# Altium PCB stimu.PcbDoc (part 1 of 2)
Units mm, origin at the board's own origin, x right, y up, seen from the top; angles counter-clockwise.
Board outline 36 x 36 mm, 6 copper layers (Top Layer, Signal Layer 1, Signal Layer 2, Signal Layer 3, Signal Layer 4, Bottom Layer), stack 1.231 mm thick; 97 components, 85 nets, 388 pads, 160 vias.
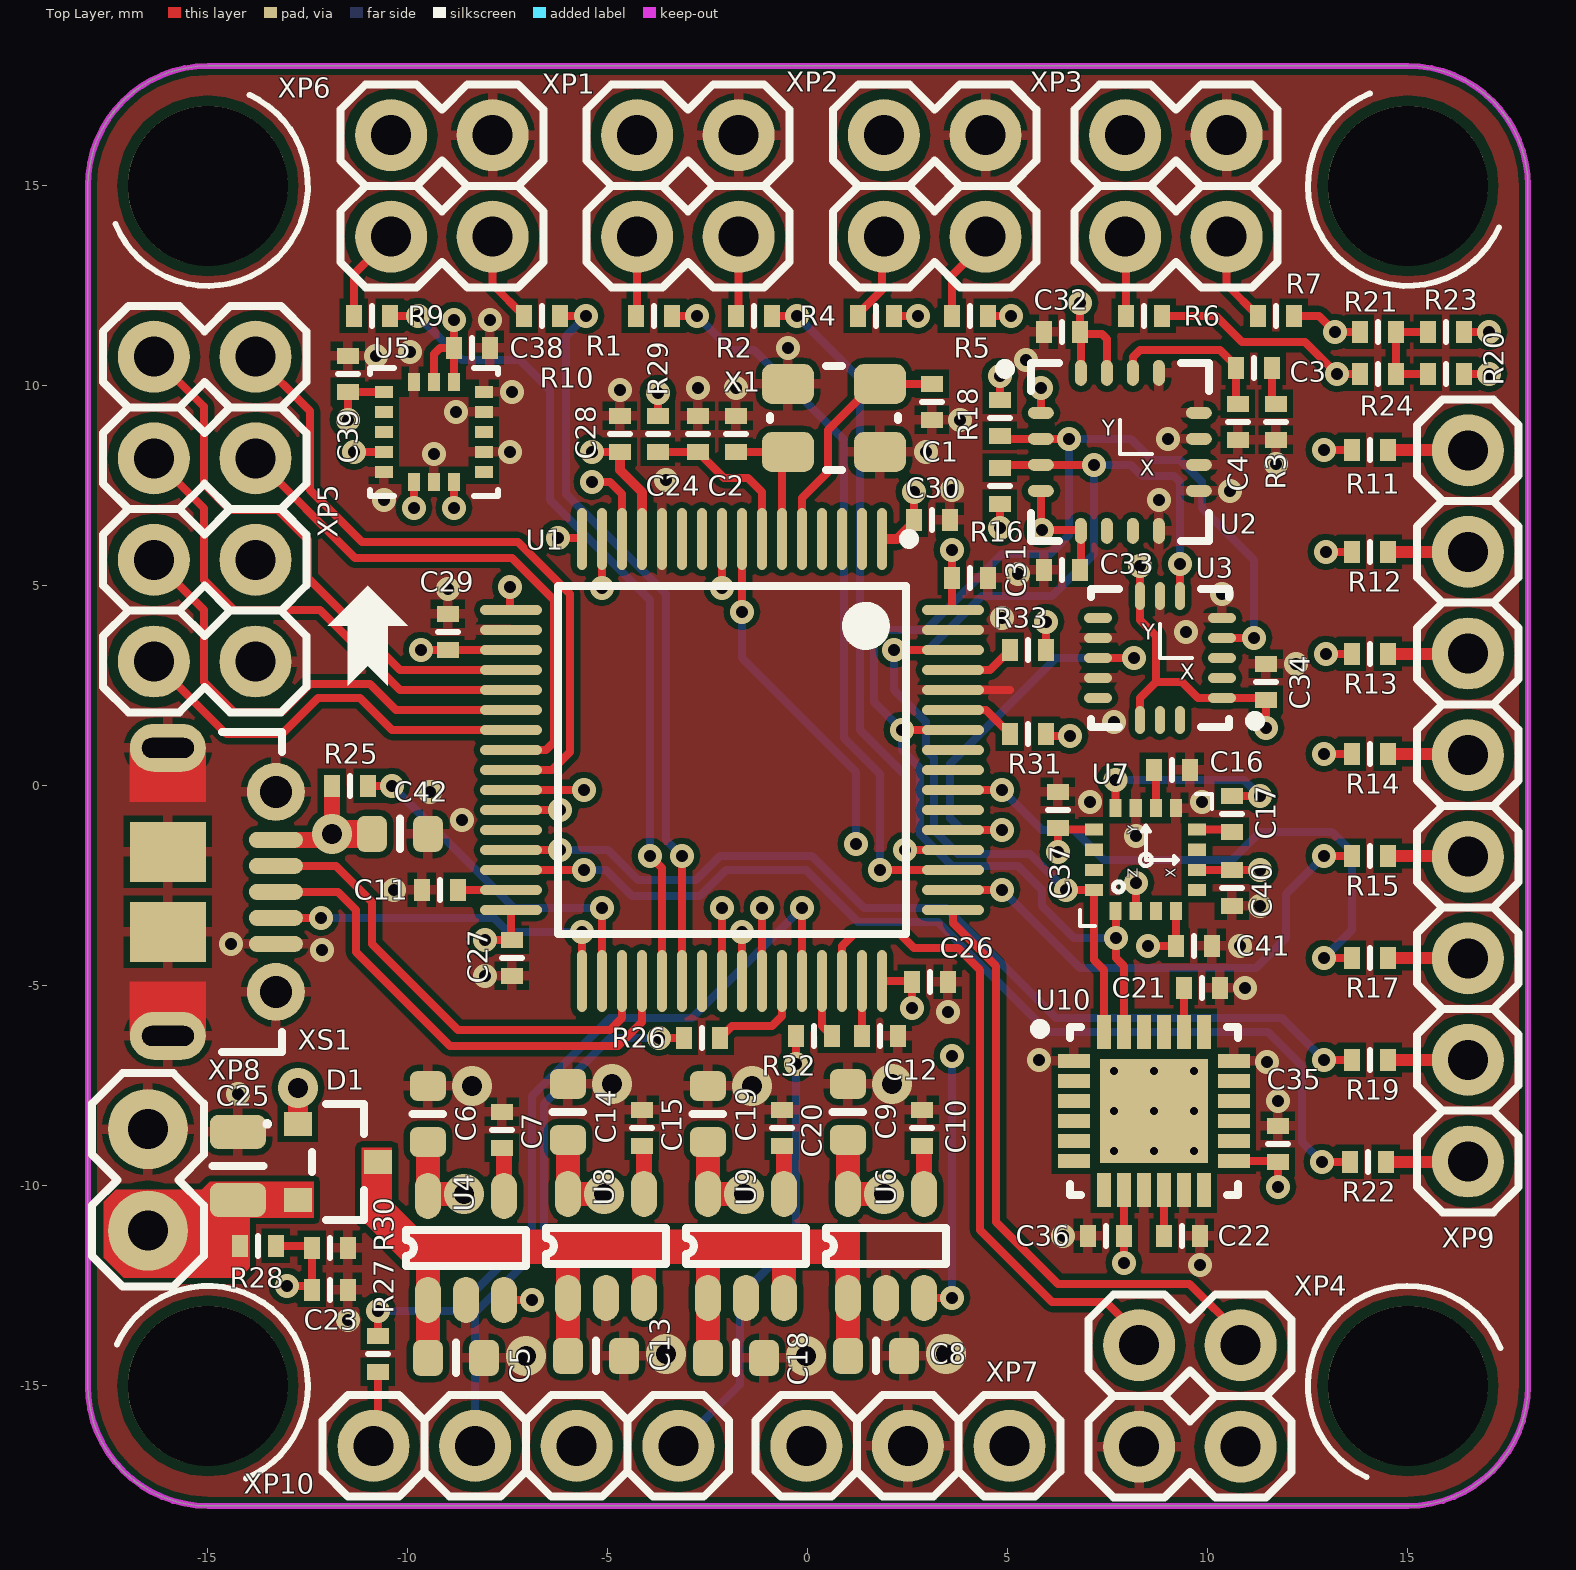
[diagram p0: Top Layer view]
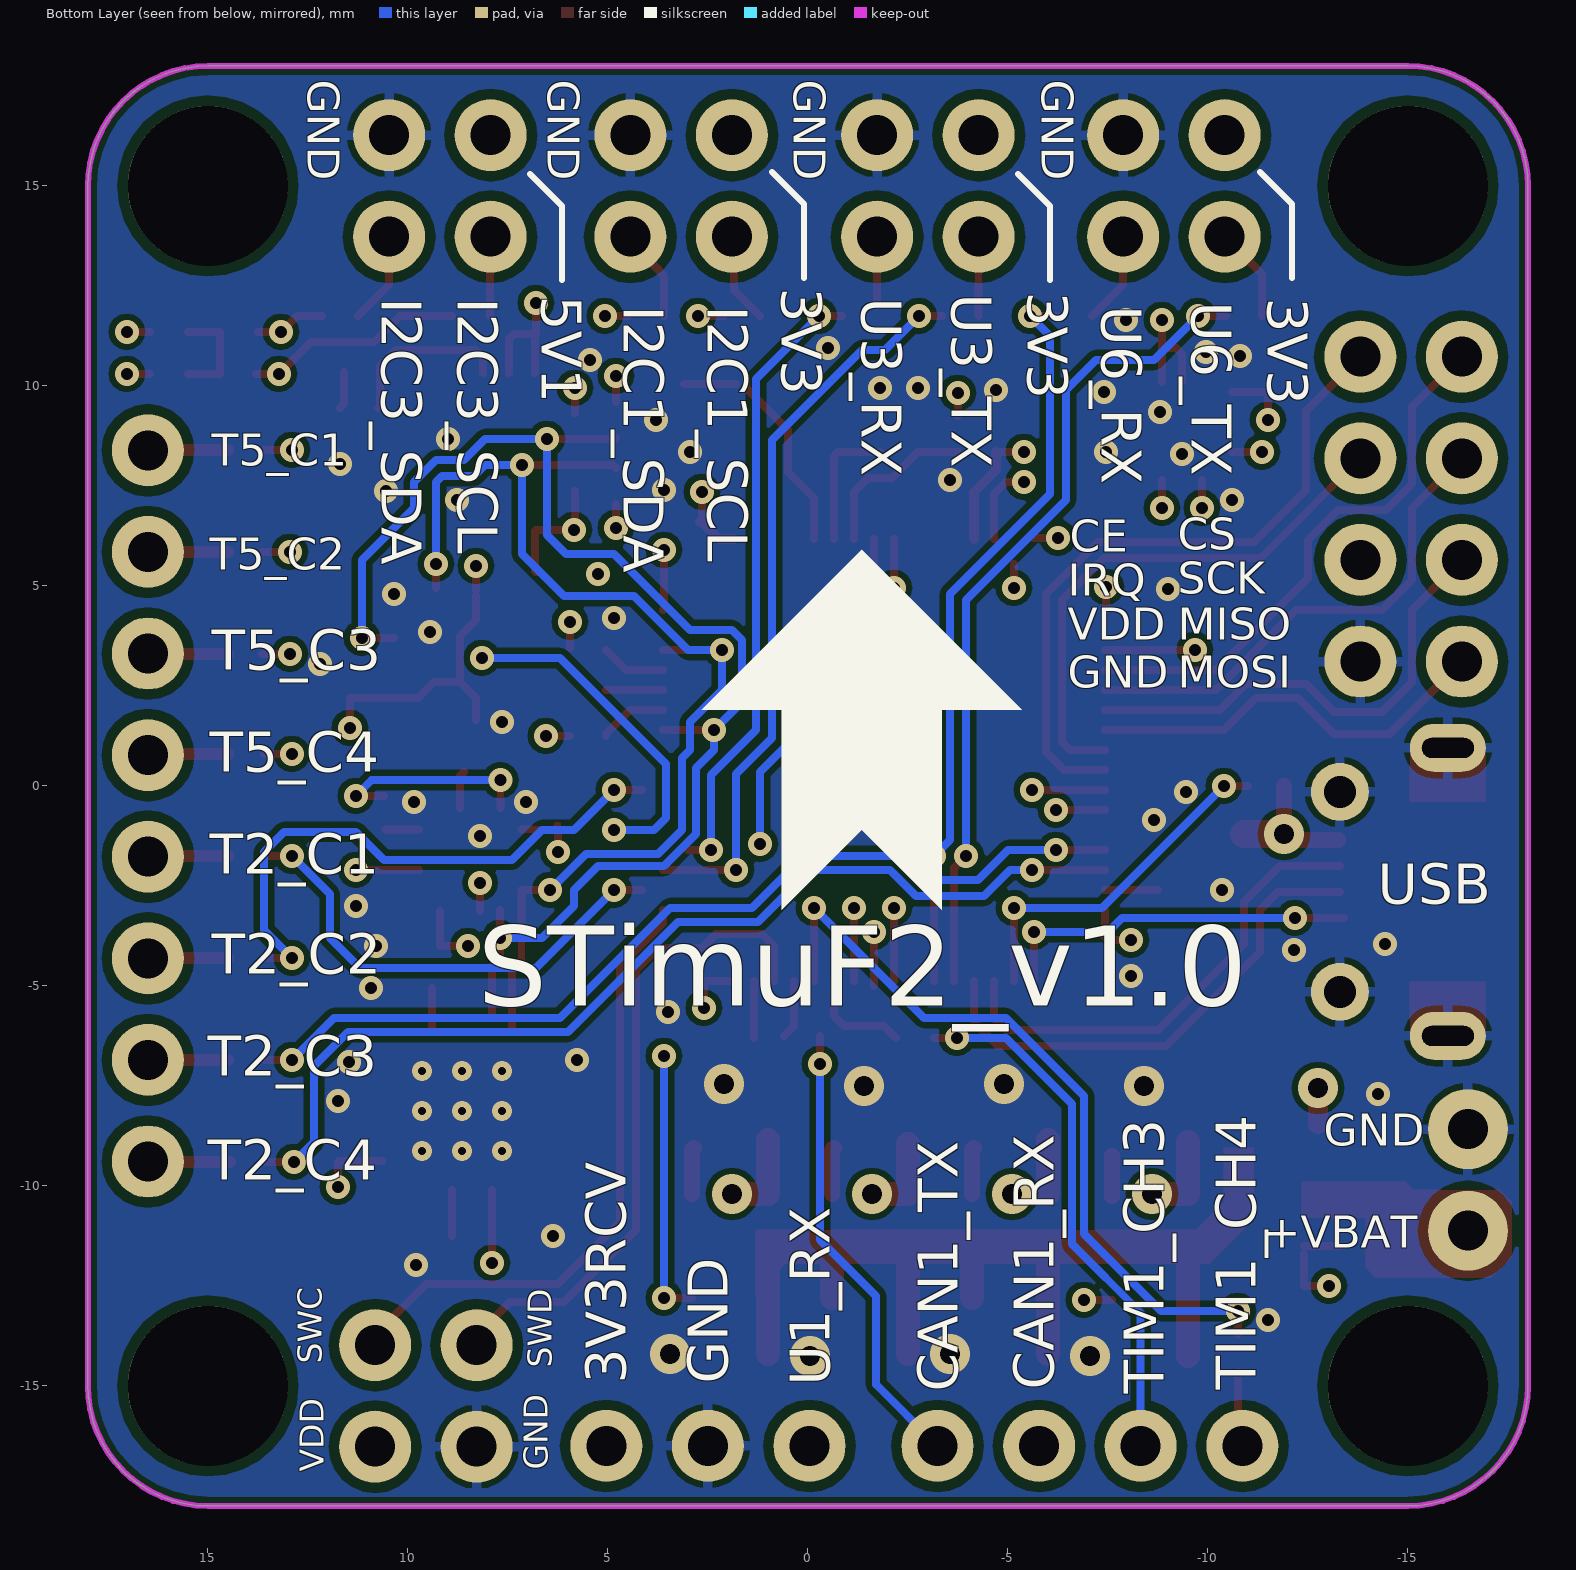
[diagram p1: Bottom Layer view, seen from below]
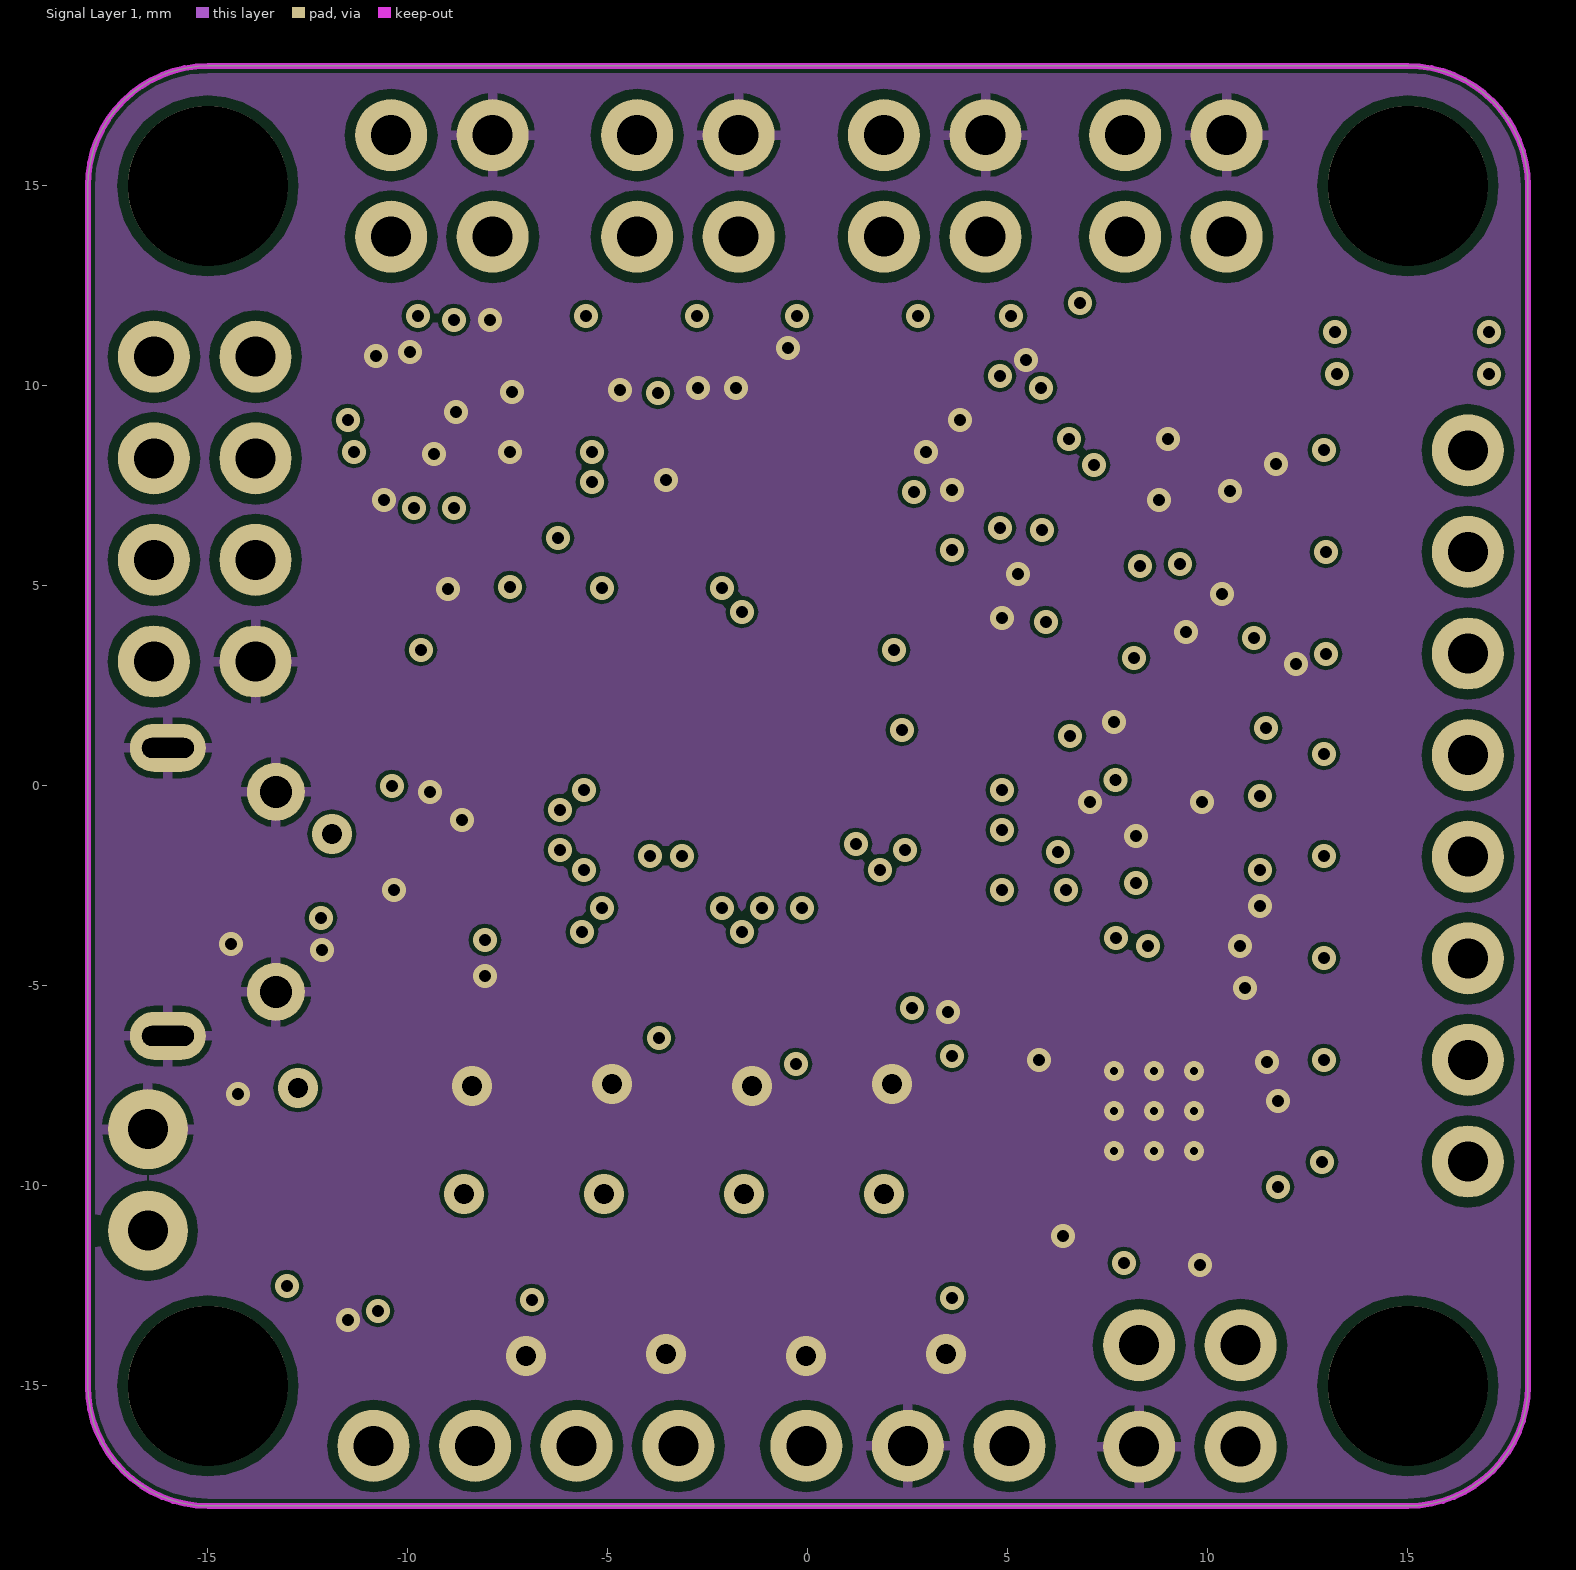
[diagram p2: Signal Layer 1]
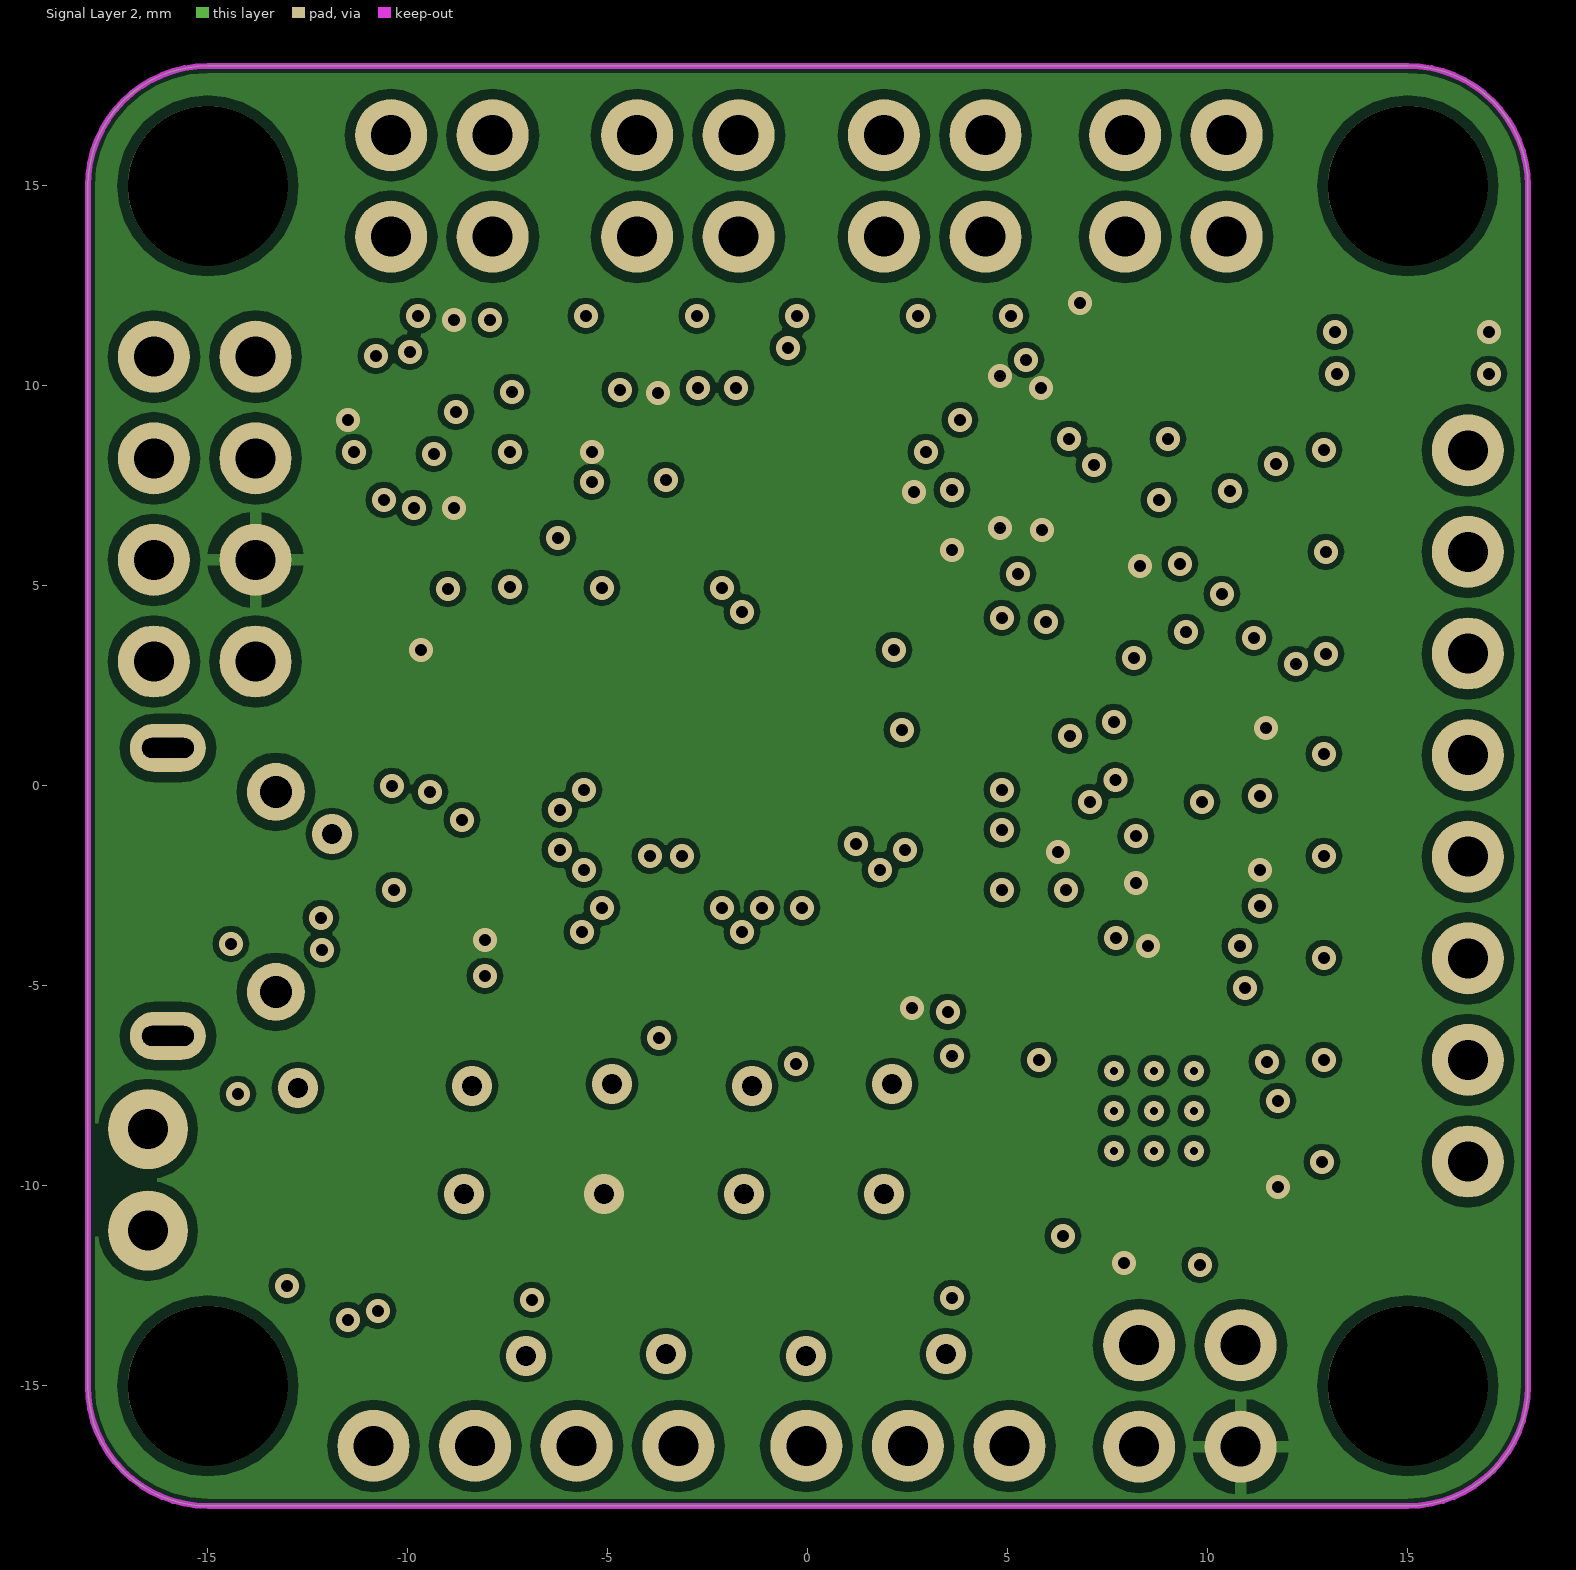
[diagram p3: Signal Layer 2]
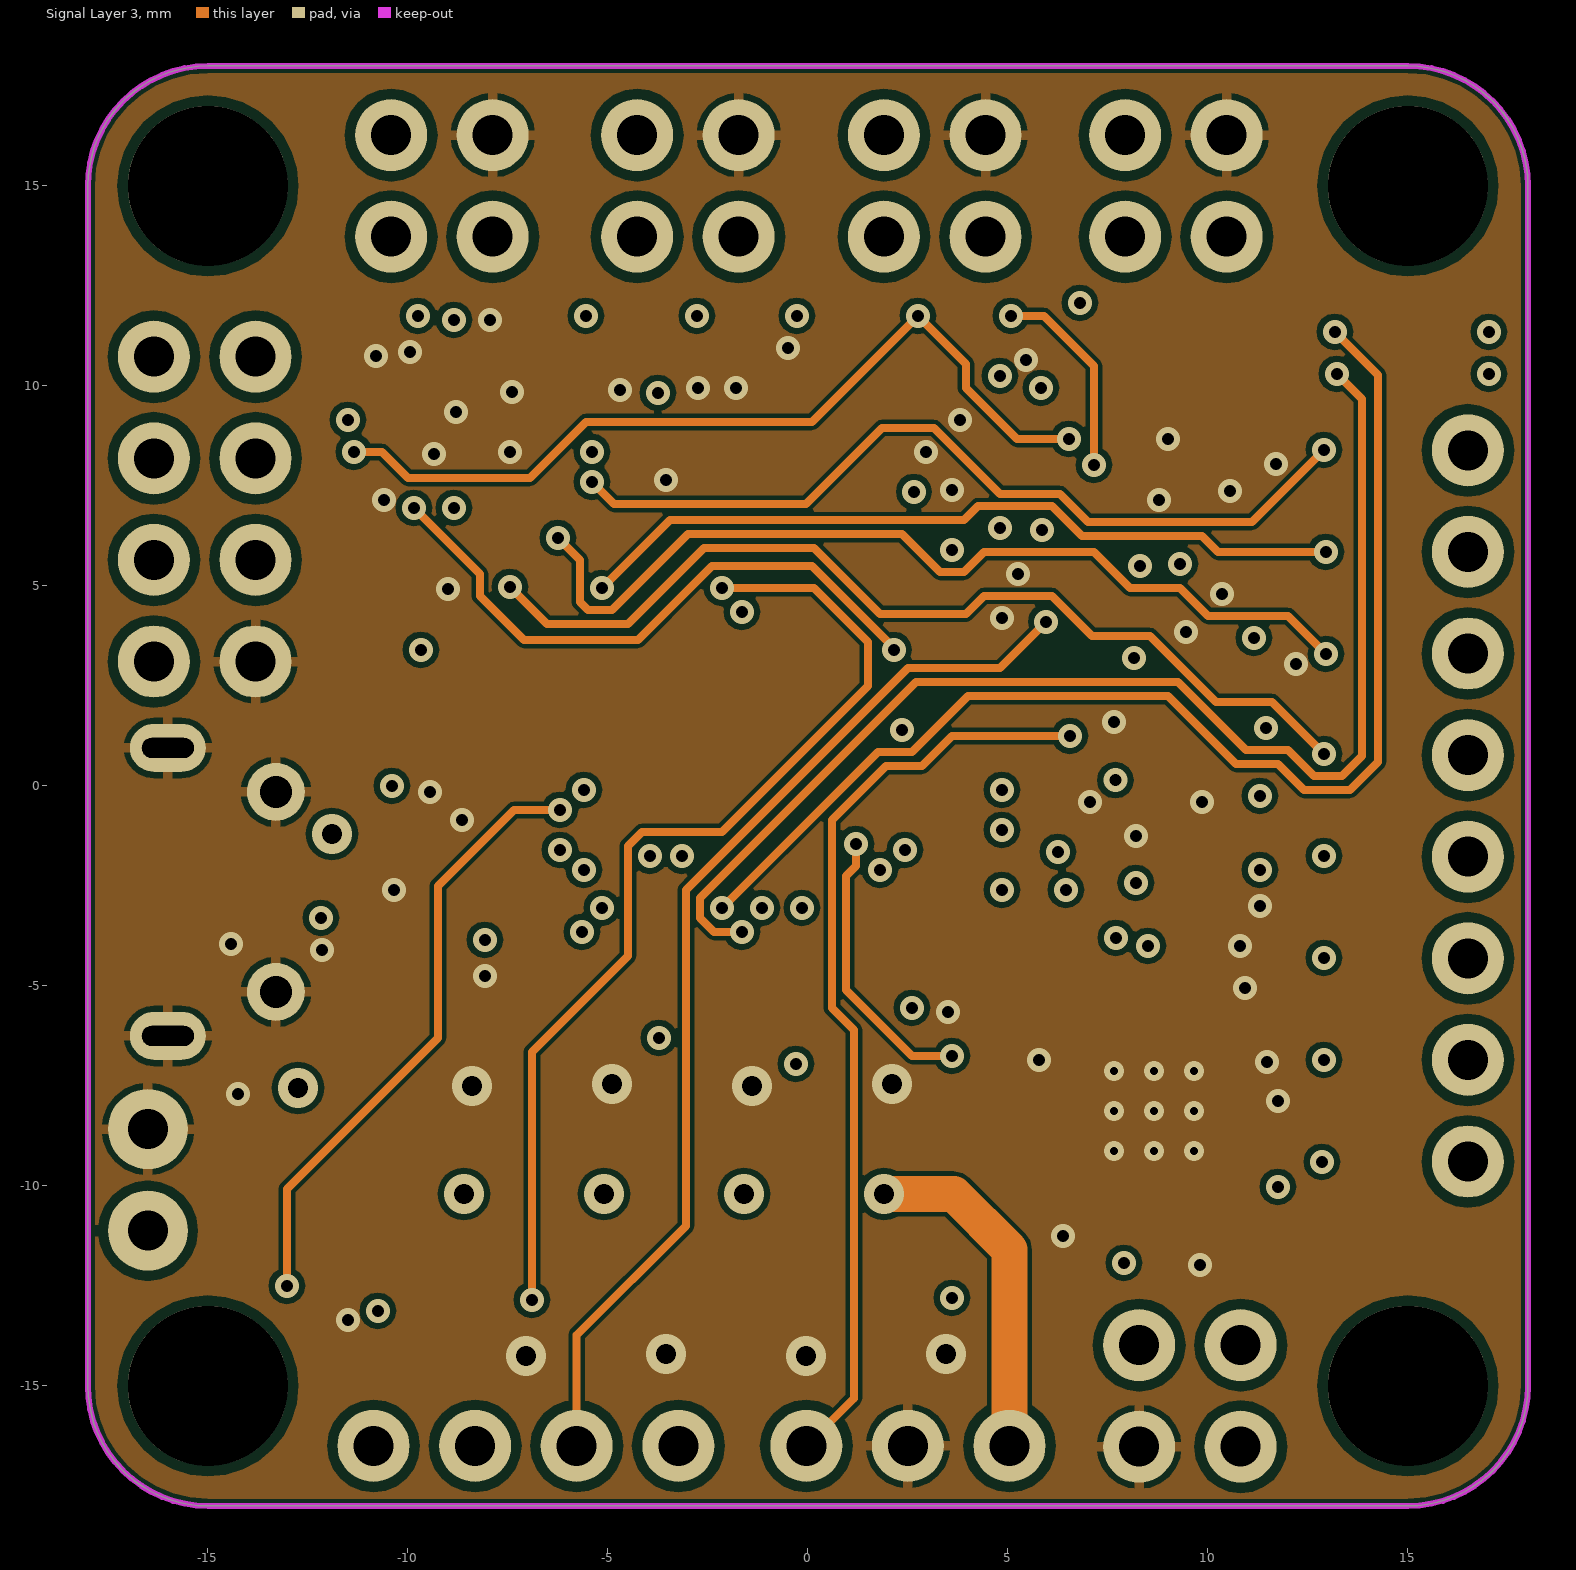
[diagram p4: Signal Layer 3]
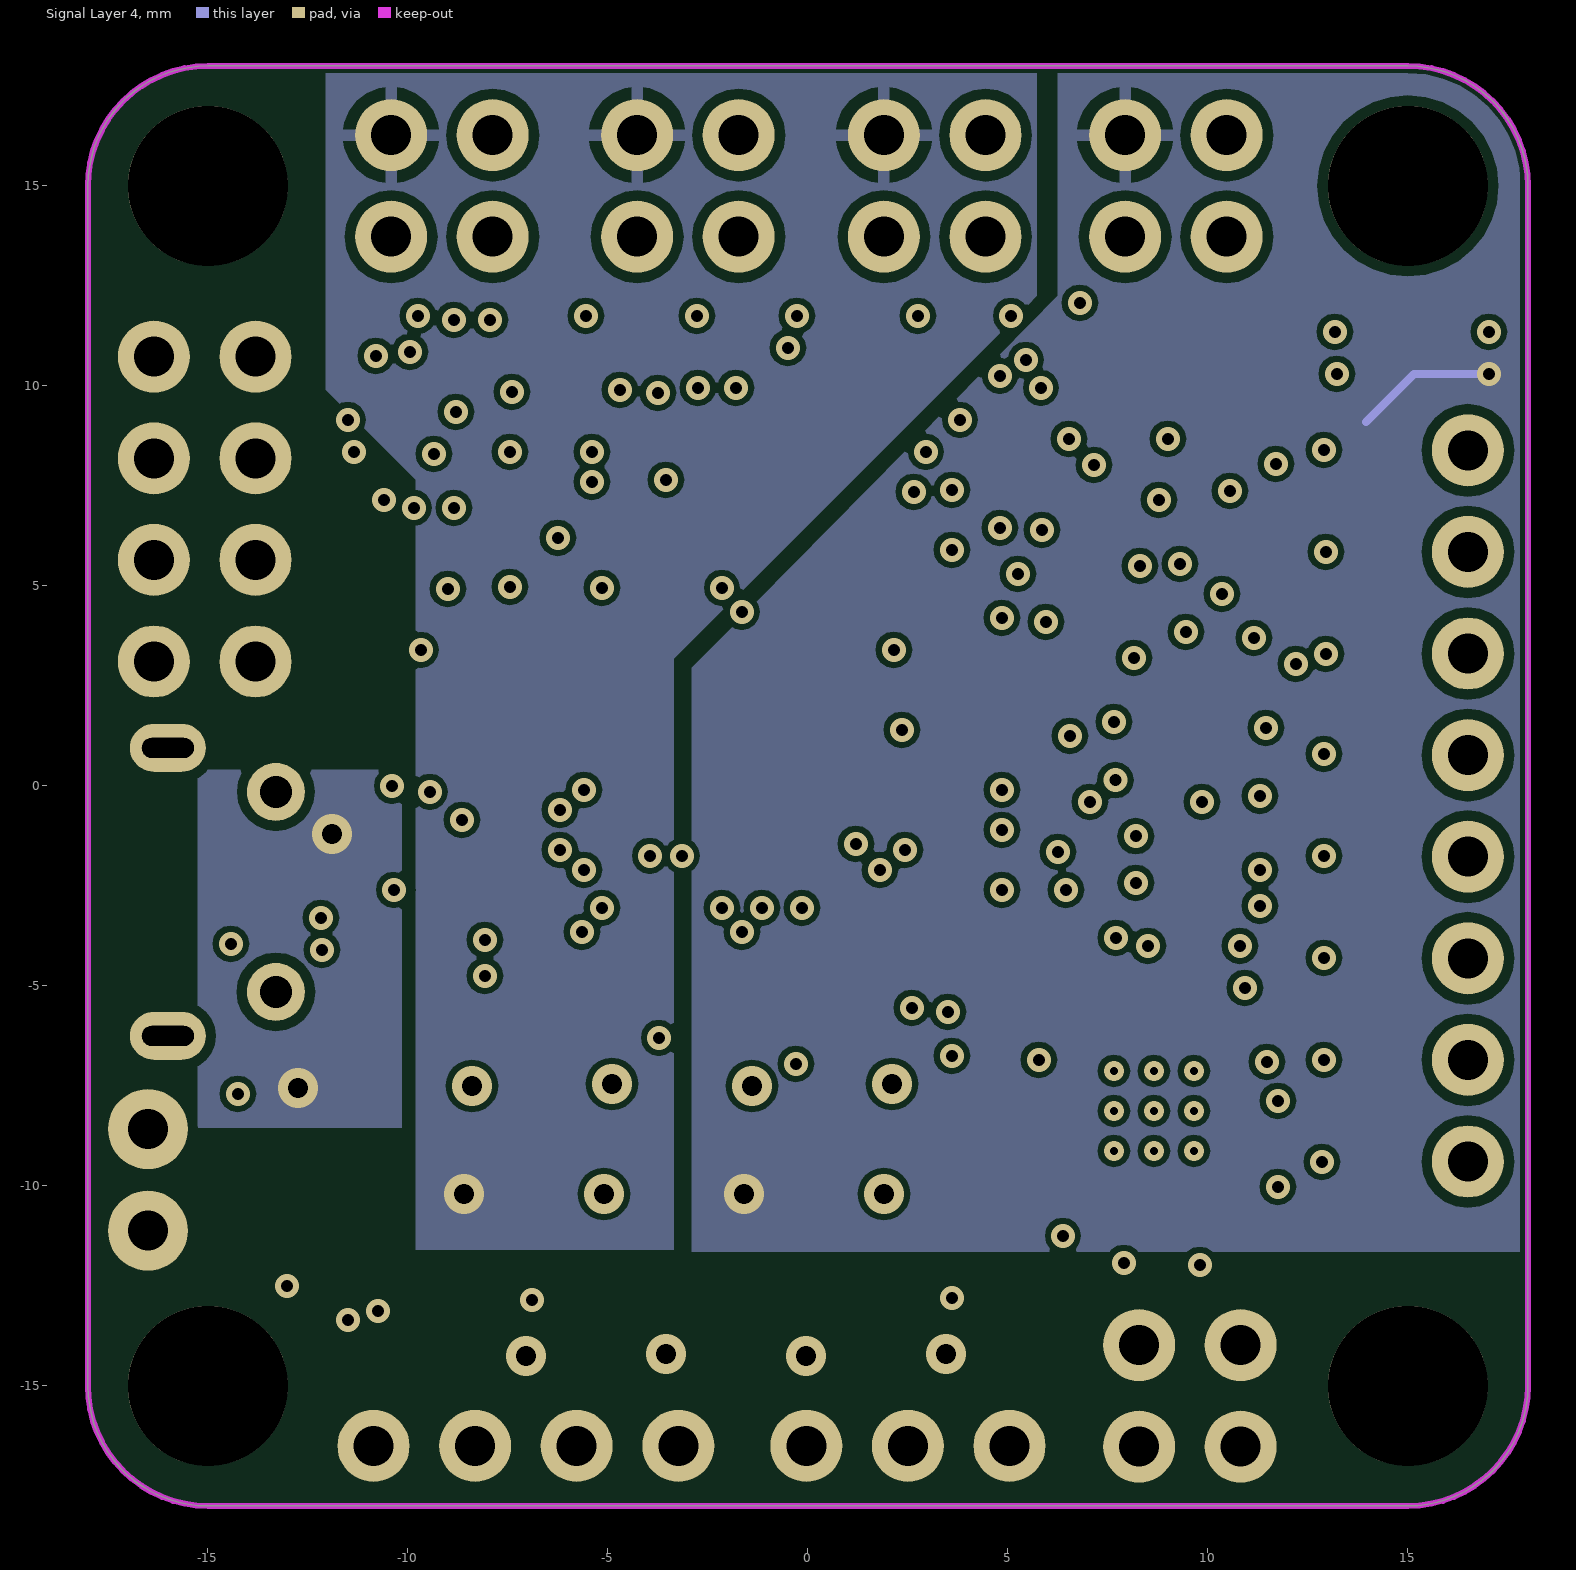
[diagram p5: Signal Layer 4]

## Layer stack, top to bottom
Top Solder: solder mask 0.0102, Solder Resist, Dk 3.5
Top Layer: signal copper 0.0356
Dielectric 1: core 0.254, FR-4, Dk 4.2
Signal Layer 1: signal copper 0.036
Dielectric 3: prepreg 0.127, Dk 4.2
Signal Layer 2: signal copper 0.036
Dielectric 2: core 0.254, Dk 4.2
Signal Layer 3: signal copper 0.036
Dielectric 5: prepreg 0.127, Dk 4.2
Signal Layer 4: signal copper 0.036
Dielectric 4: core 0.254, Dk 4.2
Bottom Layer: signal copper 0.0356
Bottom Solder: solder mask 0.0102, Solder Resist, Dk 3.5

## Board outline
-18,-15 -18,15 cw(c-15,15) -15,18 15,18 cw(c15,15) 18,15 18,-15 cw(c15,-15) 15,-18 -15,-18 cw(c-15,-15)

## Design rules (kind name [scope] priority, off if disabled: settings)
AssemblyTestPointUsage [All] p1 off:
AssemblyTestpoint [All] p1 off: testpointundercomponent=TRUE minsize=1.016 maxsize=2.54 preferedsize=1.524 minholesize=0 maxholesize=1.016 preferedholesize=0.813 testpointgrid=0.025 usegrid=TRUE gridtolerance=0 allowsidetop=TRUE allowsidebottom=TRUE
Clearance Clearance_Holes [IsPadHoleValid] p1: gap=0.25 ignorepadtopadclearanceinfootprint=FALSE except(0: Arc-Hole Track-Hole SMDPad-Hole THPad-Hole Via-Hole Fill-Hole Poly-Hole Region-Hole Text-Hole)
Clearance Clearance_Border [InPoly vs OnLayer('Keep-Out Layer, Board')] p2: gap=0.25 ignorepadtopadclearanceinfootprint=FALSE except(0: Arc-Hole Track-Hole SMDPad-Hole THPad-Hole Via-Hole Fill-Hole Poly-Hole Region-Hole Text-Hole)
Clearance Clearance_Poly_Top [InPoly and (OnLayer('Top Layer'))] p3: gap=0.15 ignorepadtopadclearanceinfootprint=FALSE except(0: Arc-Hole Track-Hole SMDPad-Hole THPad-Hole Via-Hole Fill-Hole Poly-Hole Region-Hole Text-Hole)
Clearance Clearance_Poly_Bottom [InPoly and (OnLayer('Bottom Layer'))] p4: gap=0.15 ignorepadtopadclearanceinfootprint=FALSE except(0: Arc-Hole Track-Hole SMDPad-Hole THPad-Hole Via-Hole Fill-Hole Poly-Hole Region-Hole Text-Hole)
Clearance Clearance_Via_Via [IsVia vs IsVia] p5: gap=0.15 ignorepadtopadclearanceinfootprint=FALSE except(0: Arc-Hole Track-Hole SMDPad-Hole THPad-Hole Via-Hole Fill-Hole Poly-Hole Region-Hole Text-Hole)
Clearance Clearance_Top [All vs OnLayer('Top Layer')] p6: gap=0.1 ignorepadtopadclearanceinfootprint=FALSE except(0: Arc-Hole Track-Hole SMDPad-Hole THPad-Hole Via-Hole Fill-Hole Poly-Hole Region-Hole Text-Hole)
Clearance Clearance_Bot [All vs OnLayer('Bottom Layer')] p7: gap=0.1 ignorepadtopadclearanceinfootprint=FALSE except(0: Arc-Hole Track-Hole SMDPad-Hole THPad-Hole Via-Hole Fill-Hole Poly-Hole Region-Hole Text-Hole)
Clearance Clearance_Via_Layer2 [IsVia vs OnLayer('Signal Layer 2')] p8: gap=0.15 ignorepadtopadclearanceinfootprint=FALSE except(0: Arc-Hole Track-Hole SMDPad-Hole THPad-Hole Via-Hole Fill-Hole Poly-Hole Region-Hole Text-Hole)
Clearance Clearance_Via_Layer3 [IsVia vs OnLayer('Signal Layer 3')] p9: gap=0.15 ignorepadtopadclearanceinfootprint=FALSE except(0: Arc-Hole Track-Hole SMDPad-Hole THPad-Hole Via-Hole Fill-Hole Poly-Hole Region-Hole Text-Hole)
Clearance Clearance_Via_Layer4 [IsVia vs OnLayer('Signal Layer 4')] p10: gap=0.15 ignorepadtopadclearanceinfootprint=FALSE except(0: Arc-Hole Track-Hole SMDPad-Hole THPad-Hole Via-Hole Fill-Hole Poly-Hole Region-Hole Text-Hole)
Clearance Clearance_Via_Layer5 [IsVia vs OnLayer('Signal Layer 5')] p11: gap=0.15 ignorepadtopadclearanceinfootprint=FALSE except(0: Arc-Hole Track-Hole SMDPad-Hole THPad-Hole Via-Hole Fill-Hole Poly-Hole Region-Hole Text-Hole)
Clearance Clearance_All [All] p12: gap=0.1 ignorepadtopadclearanceinfootprint=FALSE except(0: Arc-Hole Track-Hole SMDPad-Hole THPad-Hole Via-Hole Fill-Hole Poly-Hole Region-Hole Text-Hole)
ComponentClearance ComponentClearance_LCD1_DD1_DA6 [InComponent('LCD1') vs InComponent('DD1') or InComponent('DA6')] p1: gap=0 collisioncheckmode=3 verticalgap=0 showdistances=FALSE
ComponentClearance ComponentClearance_LCD1_XS1 [InComponent('LCD1') vs InComponent('XS1')] p2: gap=0 collisioncheckmode=3 verticalgap=0 showdistances=FALSE
ComponentClearance ComponentClearance_LCD1 [InComponent('LCD1')] p3: gap=0.2 collisioncheckmode=3 verticalgap=0 showdistances=FALSE
ComponentClearance [All] p4: gap=0.2 collisioncheckmode=3 verticalgap=0.2 showdistances=TRUE
FabricationTestPointUsage [All] p1 off: valid=0 allowmultiple=FALSE
FabricationTestpoint [All] p1 off: side=3 testpointundercomponent=TRUE minsize=1.016 maxsize=2.54 preferedsize=1.524 minholesize=0 maxholesize=1.016 preferedholesize=0.813 testpointgrid=0.025 allowsidetop=TRUE allowsidebottom=TRUE usegrid=TRUE gridtolerance=0
FanoutControl Fanout_BGA [IsBGA] p1 off: bgadir=Out bgaviamode=Centered fanoutstyle=Auto fanoutdirection=Alternating viagrid=0.025 // Fanout_BGA (Default Rule)
FanoutControl Fanout_LCC [IsLCC] p2 off: bgadir=Out bgaviamode=Centered fanoutstyle=Auto fanoutdirection=Alternating viagrid=0.025 // Fanout_LCC (Default Rule)
FanoutControl Fanout_SOIC [IsSOIC] p3 off: bgadir=Out bgaviamode=Centered fanoutstyle=Auto fanoutdirection=Alternating viagrid=0.025 // Fanout_SOIC (Default Rule)
FanoutControl Fanout_Small [(CompPinCount < 5)] p4 off: bgadir=Out bgaviamode=Centered fanoutstyle=Auto fanoutdirection=OutThenIn viagrid=0.025 // Fanout_Small (Default Rule)
FanoutControl Fanout_Default [All] p5 off: bgadir=Out bgaviamode=Centered fanoutstyle=Auto fanoutdirection=Alternating viagrid=0.025 // Fanout_Default (Default Rule)
HoleSize [All] p1: absolutevalues=TRUE maxlimit=5 minlimit=0.2 maxpercent=80.000 minpercent=20.000
MinimumSolderMaskSliver [All] p1 off: minsoldermaskwidth=0.1
NetAntennae [All] p1 off: netantennaetolerance=0
PlaneClearance [All] p1: clearance=0.3
PlaneConnect PlaneConnect_1 [InNet('GND')] p1: planeconnectstyle=Direct reliefexpansion=0.5 reliefentries=4 reliefconductorwidth=0.25 reliefairgap=0.25
PlaneConnect PlaneConnect_Thermopads [(InPadClass('DD4 ThermoPads'))] p2: planeconnectstyle=Direct reliefexpansion=0.508 reliefentries=4 reliefconductorwidth=0.254 reliefairgap=0.254
PlaneConnect PlaneConnect_Via [IsVia] p3: planeconnectstyle=Direct reliefexpansion=0.508 reliefentries=4 reliefconductorwidth=0.254 reliefairgap=0.254
PlaneConnect [All] p4: planeconnectstyle=Relief reliefexpansion=0.3 reliefentries=4 reliefconductorwidth=0.3 reliefairgap=0.3
PolygonConnect PolygonConnect_VIA [All vs IsVia] p1: connectstyle=Direct reliefconductorwidth=0.254 reliefentries=4 polygonreliefangle="90 Angle" airgapwidth=0.254
PolygonConnect PolygonConnect_3 [InNet('GND')] p2: connectstyle=Relief reliefconductorwidth=0.25 reliefentries=4 polygonreliefangle="90 Angle" airgapwidth=0.15
PolygonConnect PolygonConnect_4 [InNet('USB_VBUS')] p3: connectstyle=Direct reliefconductorwidth=0.254 reliefentries=4 polygonreliefangle="90 Angle" airgapwidth=0.254
PolygonConnect PolygonConnect_2 [InNet('9V_IN')] p4: connectstyle=Direct reliefconductorwidth=0.254 reliefentries=4 polygonreliefangle="90 Angle" airgapwidth=0.254
PolygonConnect PolygonConnect_1 [InNetClass('ExtraPowerLines')] p5: connectstyle=Direct reliefconductorwidth=0.254 reliefentries=4 polygonreliefangle="90 Angle" airgapwidth=0.254
PolygonConnect PolygonConnect_Thermopads [(InPadClass('DD4 ThermoPads'))] p6: connectstyle=Direct reliefconductorwidth=0.254 reliefentries=4 polygonreliefangle="90 Angle" airgapwidth=0.254
PolygonConnect PolygonConnect_DCPads [InPadClass('DCPads')] p7: connectstyle=Direct reliefconductorwidth=0.254 reliefentries=4 polygonreliefangle="90 Angle" airgapwidth=0.254
PolygonConnect PolygonConnect_DCParts [All vs InComponentClass('DCParts')] p8: connectstyle=Direct reliefconductorwidth=0.254 reliefentries=4 polygonreliefangle="90 Angle" airgapwidth=0.254
PolygonConnect [All] p9: connectstyle=Relief reliefconductorwidth=0.3 reliefentries=4 polygonreliefangle="90 Angle" airgapwidth=0.3
RoutingVias [All] p1: holewidth=0.2 width=0.4 viastyle="Through Hole" minholewidth=0.2 minwidth=0.4 maxholewidth=2 maxwidth=3
SilkToSilkClearance [All] p1 off: silktosilkclearance=0
SilkToSolderMaskClearance SilkscreenOverComponentPads [IsPad] p1: minsilkscreentomaskgap=0.1 clearancetoexposedcopper=TRUE
SolderMaskExpansion [All] p1: expansion=0.102
Width [All] p1: maxlimit=5 minlimit=0.1 preferedwidth=0.2
13 further rules are at their usual default settings.

## Components (designator, comment, footprint, x,y, rotation, side; value= is the part's Value field where it differs from the comment)
C1 "15pF" CAP0402R 3.1,9.6 r270 top
C2 "15pF" CAP0402R -1.8,8.8 r90 top
C3 "470nF" CAP0402R 11.15,10.45 r180 top
C4 "10nF" CAP0402R 10.75,9.1 r90 top
C5 "10uF" CAP0603R -8.8,-14.3 r180 top
C6 "10uF" CAP0603R -9.5,-8.2 r270 top
C7 "100nF" CAP0402R -7.65,-8.6 r90 top
C8 "10uF" CAP0603R 1.7,-14.25 r180 top
C9 "10uF" CAP0603R 1,-8.15 r270 top
C10 "100nF" CAP0402R 2.85,-8.55 r90 top
C11 "1uF" CAP0402R -9.2,-2.6 r0 top
C12 "1uF" CAP0402R 1.8,-6.25 r180 top
C13 "10uF" CAP0603R -5.3,-14.25 r180 top
C14 "10uF" CAP0603R -6,-8.15 r270 top
C15 "100nF" CAP0402R -4.15,-8.55 r90 top
C16 "4.7uF" CAP0402R 9.1,0.4 r0 top
C17 "220nF" CAP0402R 10.6,-0.7 r270 top
C18 "10uF" CAP0603R -1.8,-14.3 r180 top
C19 "10uF" CAP0603R -2.5,-8.2 r270 top
C20 "100nF" CAP0402R -0.65,-8.55 r90 top
C21 "1uF" CAP0402R 9.85,-5.05 r0 top
C22 "1uF" CAP0402R 9.35,-11.25 r0 top
C23 "1uF" CAP0402R -11.95,-12.6 r180 top
C24 "1uF" CAP0402R -2.75,8.8 r270 top
C25 "10uF" CAP0805R -14.25,-9.5 r270 top
C26 "1uF" CAP0402R 3.05,-4.9 r0 top
C27 "1uF" CAP0402R -7.4,-4.3 r270 top
C28 "1uF" CAP0402R -4.7,8.8 r90 top
C29 "1uF" CAP0402R -9,3.85 r90 top
C30 "1uF" CAP0402R 3.1,6.65 r0 top
C31 "1uF" CAP0402R 4.05,5.2 r0 top
C32 "1uF" CAP0402R 6.35,11.35 r180 top
C33 "1uF" CAP0402R 6.35,5.4 r180 top
C34 "1uF" CAP0402R 11.45,2.6 r90 top
C35 "1uF" CAP0402R 11.75,-8.95 r90 top
C36 "1uF" CAP0402R 7.45,-11.25 r180 top
C37 "1uF" CAP0402R 6.25,-0.6 r90 top
C38 "1uF" CAP0402R -8.4,10.95 r0 top
C39 "1uF" CAP0402R -11.5,10.3 r90 top
C40 "1uF" CAP0402R 10.6,-2.55 r270 top
C41 "1uF" CAP0402R 9.65,-4 r0 top
C42 "10uF" CAP0603R -10.2,-1.2 r180 top
D1 "BAT54C" NXP-SOT23-3_V -11.75,-9.4 r90 top
R1 "100" RES0402R -3.85,11.75 r180 top
R2 "100" RES0402R -1.35,11.75 r0 top
R3 "10k" RES0402R 11.7,9.1 r90 top
R4 "100" RES0402R 1.7,11.75 r180 top
R5 "100" RES0402R 4.05,11.75 r0 top
R6 "100" RES0402R 8.4,11.75 r180 top
R7 "100" RES0402R 11.7,11.75 r0 top
R9 "100" RES0402R -10.9,11.75 r180 top
R10 "100" RES0402R -6.65,11.75 r0 top
R11 "100" RES0402R 14.05,8.4 r0 top
R12 "100" RES0402R 14.05,5.85 r0 top
R13 "100" RES0402R 14.05,3.3 r0 top
R14 "100" RES0402R 14.05,0.8 r0 top
R15 "100" RES0402R 14.05,-1.75 r0 top
R16 "10k" RES0402R 4.8,7.5 r90 top
R17 "100" RES0402R 14.05,-4.3 r0 top
R18 "10k" RES0402R 4.8,9.2 r270 top
R19 "100" RES0402R 14.05,-6.85 r0 top
R20 "0" RES0402R 15.95,10.3 r180 top
R21 "10k" RES0402R 14.25,11.35 r180 top
R22 "100" RES0402R 14,-9.4 r0 top
R23 "0" RES0402R 15.95,11.35 r180 top
R24 "10k" RES0402R 14.25,10.3 r180 top
R25 "0" RES0402R -11.45,0 r180 top
R26 "100" RES0402R -2.65,-6.3 r180 top
R27 "100" RES0402R -10.75,-14.2 r270 top
R28 "10k" RES0402R -13.75,-11.5 r180 top
R29 "10k" RES0402R -3.75,8.8 r90 top
R30 "1k" RES0402R -11.95,-11.55 r180 top
R31 "100" RES0402R 5.5,1.3 r0 top
R32 "100" RES0402R 0.15,-6.25 r180 top
R33 "100" RES0402R 5.5,3.4 r0 top
U1 "STM32F205RET6" LQFP64_L -1.9,0.65 r270 top
U2 "L3G4200D" LGA16-4X4X1.1_L 7.8,8.35 r0 top
U3 "LIS3DH" STM-LGA-16_N 8.8,3.2 r180 top
U4 "LDS3985M28R" SOT23H15-5 -8.55,-11.55 r90 top
U5 "LPS331AP" HCLGA-16L -9.35,8.85 r0 top
U6 "LDS3985M28R" SOT23H15-5 1.95,-11.5 r90 top
U7 "HMC5983" HMC5983 8.45,-1.85 r90 top
U8 "LDS3985M28R" SOT23H15-5 -5.05,-11.5 r90 top
U9 "LDS3985M28R" SOT23H15-5 -1.55,-11.5 r90 top
U10 "MPU6050" INSE-QFN-24_V 8.65,-8.125 r0 top
X1 "24.0 MHz" 3225 0.65,9.2 r180 top value=24M
XP1 "PLD" PLD-04 -3,15 r270 top
XP2 "PLD" PLD-04 3.17,15 r270 top
XP3 "PLD" PLD-04 9.2,15 r270 top
XP4 "PLD" PLD-04 9.55,-15.25 r90 top
XP5 "PLD" PLD-08 -15.08,6.92 r270 top
XP6 "PLD" PLD-04 -9.15,15 r270 top
XP7 "PLS" PLS-03 2.5,-16.5 r180 top
XP8 "PLS" PLS-02 -16.5,-9.85 r90 top
XP9 "PLS" PLS-08 16.5,-0.5 r270 top
XP10 "PLS" PLS-04 -7.05,-16.5 r180 top
XS1 "105017-0001" 105017-0001 -18.15,-2.65 r270 top

## Footprints (in the part's own frame and the unit in brackets; to place one, negate y for a bottom-side part, rotate by r counter-clockwise, add the part's x,y. Pads: shape width x height; smd on the part's side, far side on the other; paste and mask are expansions set on the pad)
3225 [mm] "3.2x2.5x0.8mm Crystal"
  rrect50% 1.3x1 smd: 1(-1.15,-0.85) 2(1.15,-0.85) 3(1.15,0.85) 4(-1.15,0.85)
  silkscreen extent -1.6,-1.3 1.6,1.3, body extent -1.61,-1.25 1.61,1.25, height 0.82
105017-0001 [mm] "105017-0001 Micro USB Connector (Molex)"
  oval 0.4x1.35 smd: 1(-1.3,4.85) 2(-0.65,4.85) 3(0,4.85) 4(0.65,4.85) 5(1.3,4.85)
  oval 1.2x1.9 hole 0.5 slot 1.3 at 90 deg: SHLD(-3.6,2.15) SHLD(3.6,2.15)
  round 1.45 hole 0.8: SHLD(-2.5,4.85) SHLD(2.5,4.85)
  rect 1.5x1.9 smd: SHLD(-1,2.15) SHLD(1,2.15)
  Top Layer region: 2.25,3.1 3.6,3.1 3.6,1.2 2.25,1.2
  Top Layer region: -3.6,3.1 -2.25,3.1 -2.25,1.2 -3.6,1.2
  silkscreen extent -4,3.5 4,5, body extent -4.1,-0.4 4.1,5.03, height 2.72
CAP0402R [mm] "Capacitor 0402 reflow soldering"
  rect 0.4x0.55 smd: 1(-0.45,0) 2(0.45,0)
  silkscreen extent 0,-0.25 0,0.25, body extent -0.52,-0.27 0.53,0.28, height 0.56
CAP0603R [mm] "capacitor 0603 reflow soldering"
  rrect50% 0.745x0.9 smd: 1(-0.7,0) 2(0.7,0)
  silkscreen extent 0,-0.38 0,0.38, body extent -0.8,-0.4 0.8,0.4, height 0.81
CAP0805R [mm] "capacitor 0805 reflow soldering"
  rrect50% 0.85x1.4 smd: 1(-0.85,0) 2(0.85,0)
  silkscreen extent 0,-0.64 0,0.64, body extent -1,-0.62 1,0.63, height 0.61
HCLGA-16L [mm]
  rect 0.45x0.3 smd: 1(-1.25,1) 2(-1.25,0.5) 3(-1.25,0) 4(-1.25,-0.5) 5(-1.25,-1) 9(1.25,-1) 10(1.25,-0.5) 11(1.25,0) 12(1.25,0.5) 13(1.25,1)
  rect 0.3x0.45 smd: 6(-0.5,-1.25) 7(0,-1.25) 8(0.5,-1.25) 14(0.5,1.25) 15(0,1.25) 16(-0.5,1.25)
  silkscreen extent -1.6,-1.6 1.6,1.6, body extent -1.5,-1.5 1.5,1.5, height 1.01
HMC5983 [mil] "HMC5983"
  rect 18x12 smd: 1(-50.2,30) 2(-50.2,10) 3(-50.2,-9.84) 4(-50.2,-29.53) 9(51,-29.53) 10(51,-9.84) 11(51,10) 12(51,30)
  rect 12x18 smd: 5(-29.53,-50.2) 6(-9.84,-50.2) 7(10,-50.2) 8(30,-50.2) 13(30,51) 14(10,51) 15(-9.84,51) 16(-29.53,51)
  silkscreen extent -65,-65 65,65, body extent -59,-59 61,61, height 35
INSE-QFN-24_V [mm] "QFN, 24-Leads, Body 4.00x4.00mm, Pitch 0.50mm, Thermal Pad 2.7x2.6mm"
  rect 0.8x0.35 smd: 1(-2,1.25) 2(-2,0.75) 3(-2,0.25) 4(-2,-0.25) 5(-2,-0.75) 6(-2,-1.25) 13(2,-1.25) 14(2,-0.75) 15(2,-0.25) 16(2,0.25) 17(2,0.75) 18(2,1.25)
  rect 0.35x0.85 smd: 7(-1.25,-1.975) 8(-0.75,-1.975) 9(-0.25,-1.975) 10(0.25,-1.975) 11(0.75,-1.975) 12(1.25,-1.975) 19(1.25,1.975) 20(0.75,1.975) 21(0.25,1.975) 22(-0.25,1.975) 23(-0.75,1.975) 24(-1.25,1.975)
  rect 2.7x2.6 smd: 25(0,0)
  silkscreen extent -2.97,-2.1 2.1,2.17, body extent -2,-2 2,2, height 0.95
LGA16-4X4X1.1_L [mm] "PQFN, 16-Leads, Body 4x4mm, Pitch 0.65mm, IPC High Density"
  oval 0.65x0.3 smd: 1(-1.975,0.975) 2(-1.975,0.325) 3(-1.975,-0.325) 4(-1.975,-0.975) 9(1.975,-0.975) 10(1.975,-0.325) 11(1.975,0.325) 12(1.975,0.975)
  oval 0.3x0.65 smd: 5(-0.975,-1.975) 6(-0.325,-1.975) 7(0.325,-1.975) 8(0.975,-1.975) 13(0.975,1.975) 14(0.325,1.975) 15(-0.325,1.975) 16(-0.975,1.975)
  silkscreen extent -3,-2.22 2.22,2.22, body extent -2.07,-2.07 2.07,2.07, height 1.1
LQFP64_L [mm] "Thin QFP, 64-Leads, Body 10x10mm, Pitch 0.5mm, IPC High Density"
  oval 1.55x0.25 smd: 1(-5.525,3.75) 2(-5.525,3.25) 3(-5.525,2.75) 4(-5.525,2.25) 5(-5.525,1.75) 6(-5.525,1.25) 7(-5.525,0.75) 8(-5.525,0.25) 9(-5.525,-0.25) 10(-5.525,-0.75) 11(-5.525,-1.25) 12(-5.525,-1.75) 13(-5.525,-2.25) 14(-5.525,-2.75) 15(-5.525,-3.25) 16(-5.525,-3.75) 33(5.525,-3.75) 34(5.525,-3.25) 35(5.525,-2.75) 36(5.525,-2.25) 37(5.525,-1.75) 38(5.525,-1.25) 39(5.525,-0.75) 40(5.525,-0.25) 41(5.525,0.25) 42(5.525,0.75) 43(5.525,1.25) 44(5.525,1.75) 45(5.525,2.25) 46(5.525,2.75) 47(5.525,3.25) 48(5.525,3.75)
  oval 0.25x1.55 smd: 17(-3.75,-5.525) 18(-3.25,-5.525) 19(-2.75,-5.525) 20(-2.25,-5.525) 21(-1.75,-5.525) 22(-1.25,-5.525) 23(-0.75,-5.525) 24(-0.25,-5.525) 25(0.25,-5.525) 26(0.75,-5.525) 27(1.25,-5.525) 28(1.75,-5.525) 29(2.25,-5.525) 30(2.75,-5.525) 31(3.25,-5.525) 32(3.75,-5.525) 49(3.75,5.525) 50(3.25,5.525) 51(2.75,5.525) 52(2.25,5.525) 53(1.75,5.525) 54(1.25,5.525) 55(0.75,5.525) 56(0.25,5.525) 57(-0.25,5.525) 58(-0.75,5.525) 59(-1.25,5.525) 60(-1.75,5.525) 61(-2.25,5.525) 62(-2.75,5.525) 63(-3.25,5.525) 64(-3.75,5.525)
  silkscreen extent -5.65,-4.35 4.35,4.55, body extent -5,-5 5,5, height 1.6
NXP-SOT23-3_V [mm] "SOT23, 3-Leads, Body 1.3x2.9mm, Pitch 0.95mm"
  rect 0.6x0.7 smd paste-0.05: 1(0.95,1) 2(-0.95,1) 3(0,-1)
  silkscreen extent -1.45,-0.65 1.45,1.79, body extent -1.45,-0.65 1.45,0.65, height 1.1
PLD-04 [mm]
  round 1.8 hole 1: 1(-1.27,-1.27) 2(-1.27,1.27) 3(1.27,-1.27) 4(1.27,1.27)
  silkscreen extent -2.54,-2.54 2.54,2.54, body extent -2.54,-2.54 2.54,2.54, height 8.45
PLD-08 [mm]
  round 1.8 hole 1: 1(-3.81,-1.27) 2(-3.81,1.27) 3(-1.27,-1.27) 4(-1.27,1.27) 5(1.27,-1.27) 6(1.27,1.27) 7(3.81,-1.27) 8(3.81,1.27)
  silkscreen extent -5.08,-2.54 5.08,2.54, body extent -5.08,-2.54 5.08,2.54, height 8.45
PLS-02 [mm]
  round 2 hole 1: 1(-1.27,0) 2(1.27,0)
  silkscreen extent -2.67,-1.4 2.67,1.4, body extent -2.54,-1.27 2.54,1.27, height 8.45
PLS-03 [mm]
  round 1.8 hole 1: 1(-2.54,0) 2(0,0) 3(2.54,0)
  silkscreen extent -3.81,-1.27 3.81,1.27, body extent -3.81,-1.27 3.81,1.27, height 8.45
PLS-04 [mm]
  round 1.8 hole 1: 1(-3.81,0) 2(-1.27,0) 3(1.27,0) 4(3.81,0)
  silkscreen extent -5.08,-1.27 5.08,1.27, body extent -5.08,-1.27 5.08,1.27, height 8.45
PLS-08 [mm]
  round 1.8 hole 1: 1(-8.89,0) 2(-6.35,0) 3(-3.81,0) 4(-1.27,0) 5(1.27,0) 6(3.81,0) 7(6.35,0) 8(8.89,0)
  silkscreen extent -10.16,-1.27 10.16,1.27, body extent -10.16,-1.27 10.16,1.27, height 8.45
RES0402R [mm] "resistor 0402 reflow soldering"
  rect 0.4x0.55 smd: 1(-0.45,0) 2(0.45,0)
  silkscreen extent 0,-0.25 0,0.25, body extent -0.5,-0.25 0.5,0.25, height 0.36
SOT23H15-5 [mm] "SOT23, 5-Leads, Body 2.9x1.6mm, Pitch 0.95mm, Lead Span 2.8mm, IPC High Density"
  oval 1.15x0.65 smd mask+0.1: 1(-1.3,0.95) 2(-1.3,0) 3(-1.3,-0.95) 4(1.3,-0.95) 5(1.3,0.95)
  silkscreen extent -0.45,-1.5 0.45,1.5, body extent -1.5,-1.5 1.5,1.5, height 1.3
STM-LGA-16_N [mm] "LGA, 16-Leads, Body 3.15x3.15mm, Pitch 0.5mm, IPC Medium Density"
  oval 0.7x0.25 smd: 1(-1.55,1) 2(-1.55,0.5) 3(-1.55,0) 4(-1.55,-0.5) 5(-1.55,-1) 9(1.55,-1) 10(1.55,-0.5) 11(1.55,0) 12(1.55,0.5) 13(1.55,1)
  oval 0.25x0.7 smd: 6(-0.5,-1.55) 7(0,-1.55) 8(0.5,-1.55) 14(0.5,1.55) 15(0,1.55) 16(-0.5,1.55)
  silkscreen extent -2.5,-1.73 1.73,1.73, body extent -1.58,-1.58 1.58,1.58, height 1

## Part data
C1 C2: library part CC0402_15PF_50V_5%_NP0, Case=0402, Manufacturer=GENERIC, Manufacturer1 ComponentHeight=0.55mm, Manufacturer1 Example=PHYCOMP, Manufacturer1 Part Number=223886915159, Manufacturer Part Number 2=CC0402JPNPO9BN150, Tolerance=±5%, Voltage=50V, Author="I. Kuznetsov", Component Type=Standard, CreateDate=03.12.2007, HelpURL=\\cern.ch\dfs\Applications\Altium\Datasheets\CC0402_NP0_PHYCOMP.pdf, LatestRevisionDate=03.12.2007, Manufacturer Part Number=CC0402_15PF_50V_5%_NP0, Mounted=Yes, Part Description="SMD Multilayer Chip Ceramic Capacitor", Part Number=CC0402_15PF_50V_5%_NP0, Pin Count=2, SMD=Yes, Socket=No, Status="Not Recommended", Table="Capacitors SMD", TC=NP0
C3: library part CC0402_470NF_6.3V_10%_X5R, Case=0402, Manufacturer=GENERIC, Manufacturer1 ComponentHeight=0.55mm, Manufacturer1 Example=MURATA, Manufacturer1 Part Number=GRM155R60J474KE19D, Tolerance=±10%, Voltage=6.3V, Author="I. Kuznetsov", Component Type=Standard, CreateDate=22.04.2010, HelpURL=\\cern.ch\dfs\Applications\Altium\Datasheets\CC0402_X5R_MURATA_GRM.pdf, LatestRevisionDate=22.04.2010, Manufacturer Part Number=CC0402_470NF_6.3V_10%_X5R, Mounted=Yes, Part Description="SMD Multilayer Chip Ceramic Capacitor", Part Number=CC0402_470NF_6.3V_10%_X5R, Pin Count=2, SMD=Yes, Socket=No, Status=Preferred, Table="Capacitors SMD", TC=X5R
C4: library part CC0402_10NF_25V_10%_X7R, Case=0402, Manufacturer=GENERIC, Manufacturer1 ComponentHeight=0.55mm, Manufacturer1 Example=TDK, Manufacturer1 Part Number=C1005X7R1E103KT, Tolerance=±10%, Voltage=25V, Author="I. Kuznetsov", Component Type=Standard, CreateDate=25.10.2012, HelpURL=\\cern.ch\dfs\Applications\Altium\Datasheets\CC0402_X7R_TDK_C.pdf, LatestRevisionDate=25.10.2012, Manufacturer Part Number=CC0402_10NF_25V_10%_X7R, Mounted=Yes, Part Description="SMD Multilayer Chip Ceramic Capacitor", Part Number=CC0402_10NF_25V_10%_X7R, Pin Count=2, SMD=Yes, Socket=No, Status=Preferred, Table="Capacitors SMD", TC=X7R
C5 C6 C8 C9 C13 C14 C18 C19 C42: library part CC0603_10UF_6.3V_20%_X5R, Case=0603, Manufacturer=GENERIC, Manufacturer1 ComponentHeight=0.95mm, Manufacturer1 Example=KEMET, Manufacturer1 Part Number=C0603C106M9PAC, Manufacturer Part Number=CC0603_10uF_6.3V_20%_X5R, Tolerance=±20%, Voltage=6.3V, Author="I. Kuznetsov", Component Type=Standard, CreateDate=03.12.2007, HelpURL=\\cern.ch\dfs\Applications\Altium\Datasheets\CC0603_X5R_KEMET.pdf, LatestRevisionDate=03.12.2007, Mounted=Yes, Part Description="SMD Multilayer Chip Ceramic Capacitor", Part Number=CC0603_10UF_6.3V_20%_X5R, Pin Count=2, SMD=Yes, Socket=No, Status=Preferred, Table="Capacitors SMD", TC=X5R
C7 C10 C15 C20: library part CC0402_100NF_16V_10%_X5R, Case=0402, Manufacturer=GENERIC, Manufacturer1 ComponentHeight=0.55mm, Manufacturer1 Example=MURATA, Manufacturer1 Part Number=GRM155R61C104KA88D, Manufacturer Part Number 2=CC0402KPX5R7BB104, Tolerance=±10%, Voltage=16V, Author="I. Kuznetsov", Component Type=Standard, CreateDate=10.12.2013, HelpURL=\\cern.ch\dfs\Applications\Altium\Datasheets\CC0402_X5R_MURATA_GRM.pdf, LatestRevisionDate=10.12.2013, Manufacturer Part Number=CC0402_100NF_16V_10%_X5R, Mounted=Yes, Part Description="SMD Multilayer Chip Ceramic Capacitor", Part Number=CC0402_100NF_16V_10%_X5R, Pin Count=2, SMD=Yes, Socket=No, Status=None, Table="Capacitors SMD", TC=X5R
C11 C12 C21 C22 C23 C24 C26 C27 C28 C29 C30 C31 C32 C33 C34 C35 C36 C37 C38 C39 C40 C41: library part CC0402_1UF_16V_10%_X5R, Case=0402, Manufacturer=GENERIC, Manufacturer1 ComponentHeight=0.55mm, Manufacturer1 Example=TDK, Manufacturer1 Part Number=C1005X5R1C105KT, Tolerance=±10%, Voltage=16V, Author="I. Kuznetsov", Component Type=Standard, CreateDate=25.10.2012, HelpURL=\\cern.ch\dfs\Applications\Altium\Datasheets\CC0402_X5R_TDK_C.pdf, LatestRevisionDate=25.10.2012, Manufacturer Part Number=CC0402_1UF_16V_10%_X5R, Mounted=Yes, Part Description="SMD Multilayer Chip Ceramic Capacitor", Part Number=CC0402_1UF_16V_10%_X5R, Pin Count=2, SMD=Yes, Socket=No, Status=Preferred, Table="Capacitors SMD", TC=X5R
C16: library part CC0402_4.7UF_4V_20%_X5R, Case=0402, Manufacturer=GENERIC, Manufacturer1 ComponentHeight=0.55mm, Manufacturer1 Example=KEMET, Manufacturer1 Part Number=C0402C475M7PAC, Manufacturer Part Number 2=CC0402MRX5R4BB475, Tolerance=±20%, Voltage=4V, Author="I. Kuznetsov", Component Type=Standard, CreateDate=08.06.2010, HelpURL=\\cern.ch\dfs\Applications\Altium\Datasheets\CC0402_X5R_KEMET.pdf, LatestRevisionDate=08.06.2010, Manufacturer Part Number=CC0402_4.7UF_4V_20%_X5R, Mounted=Yes, Part Description="SMD Multilayer Chip Ceramic Capacitor", Part Number=CC0402_4.7UF_4V_20%_X5R, Pin Count=2, SMD=Yes, Socket=No, Status=Preferred, Table="Capacitors SMD", TC=X5R
C17: library part CC0402_220NF_16V_10%_X7R, Case=0402, Manufacturer=GENERIC, Manufacturer1 ComponentHeight=0.55mm, Manufacturer1 Example=TDK, Manufacturer1 Part Number=C1005X7R1C224KT, Manufacturer Part Number 2=CC0402KRX7R7BB224, Tolerance=±10%, Voltage=16V, Author="I. Kuznetsov", Component Type=Standard, CreateDate=25.10.2012, HelpURL=\\cern.ch\dfs\Applications\Altium\Datasheets\CC0402_X7R_TDK_C.pdf, LatestRevisionDate=25.10.2012, Manufacturer Part Number=CC0402_220NF_16V_10%_X7R, Mounted=Yes, Part Description="SMD Multilayer Chip Ceramic Capacitor", Part Number=CC0402_220NF_16V_10%_X7R, Pin Count=2, SMD=Yes, Socket=No, Status=Preferred, Table="Capacitors SMD", TC=X7R
C25: library part CC0805_10UF_10V_10%_X7R, Case=0805, Manufacturer=GENERIC, Manufacturer1 ComponentHeight=1.35mm, Manufacturer1 Example=MURATA, Manufacturer1 Part Number=GRM21BR71A106KE51L, Manufacturer Part Number 2=CC0805KKX7R6BB106, Tolerance=±10%, Voltage=10V, Author="I. Kuznetsov", Component Type=Standard, CreateDate=30.04.2012, HelpURL=\\cern.ch\dfs\Applications\Altium\Datasheets\CC0805_X7R_MURATA.pdf, LatestRevisionDate=30.04.2012, Manufacturer Part Number=CC0805_10UF_10V_10%_X7R, Mounted=Yes, Part Description="SMD Multilayer Chip Ceramic Capacitor", Part Number=CC0805_10UF_10V_10%_X7R, Pin Count=2, SMD=Yes, Socket=No, Status=Preferred, Table="Capacitors SMD", TC=X7R
D1: library part CMP-0417-00003-1, "Schottky Barrier Diode, 30 V, 2 uA, -55 to 150 degC, 3-Pin SOT23, RoHS, Tape and Reel", Manufacturer="NXP Semiconductors", Temperature Range="-55 to 150 degC", Cd (pF)=10, ComponentLink1Description="Manufacturer URL", ComponentLink1URL=http://www.nxp.com/, ComponentLink2Description=Datasheet, ComponentLink2URL=http://www.nxp.com/documents/data_sheet/BAT54_SER.pdf, DatasheetVersion="Rev. 5", IR (uA)=2, Mounting Technology="Surface Mount", PackageDescription="3-Pin Plastic Surface-mounted Package, Body 1.3 x 2.9 mm, Pitch 0.95 mm", PackageReference=SOT23-3, Packing="Tape and Reel", PartNumber=BAT54C, RoHS=TRUE, Rth(j-a) (K/W)=500, Trr (ns)=5, VF (mV)=800, VR (V)=30
R1 R2 R4 R5 R6 R7 R9 R10 R11 R12 R13 R14 R15 R17 R19 R22 R26 R27 R31 R32 R33: library part R0402_100R_1%_0.0625W_100PPM, Case=0402, Manufacturer=GENERIC, Manufacturer1 ComponentHeight=0.4mm, Manufacturer1 Example="YAGEO PHYCOMP", Manufacturer1 Part Number=232270671001L, Power=0.0625W, Tolerance=±1%, Author="CERN DEM JLC", Component Type=Standard, CreateDate=03.12.2007, HelpURL=\\cern.ch\dfs\Applications\Altium\Datasheets\R0402_Phycomp_RC0402.pdf, LatestRevisionDate=17.10.2012, Manufacturer Part Number=R0402_100R_1%_0.0625W_100PPM, Mounted=Yes, Part Description="General Purpose Thick Film Chip Resistor", Part Number=R0402_100R_1%_0.0625W_100PPM, Pin Count=2, SMD=Yes, Socket=No, Status="Not recommended", Table="Resistors SMD", TC=±100ppm/°C
R3 R16 R18 R21 R24 R28 R29: library part R0402_10K_1%_0.0625W_100PPM, Case=0402, Manufacturer=GENERIC, Manufacturer1 ComponentHeight=0.4mm, Manufacturer1 Example="YAGEO PHYCOMP", Manufacturer1 Part Number=232270671003L, Power=0.0625W, Tolerance=±1%, Author="CERN DEM JLC", Component Type=Standard, CreateDate=03.12.2007, HelpURL=\\cern.ch\dfs\Applications\Altium\Datasheets\R0402_Phycomp_RC0402.pdf, LatestRevisionDate=17.10.2012, Manufacturer Part Number=R0402_10K_1%_0.0625W_100PPM, Mounted=Yes, Part Description="General Purpose Thick Film Chip Resistor", Part Number=R0402_10K_1%_0.0625W_100PPM, Pin Count=2, SMD=Yes, Socket=No, Status="Not recommended", Table="Resistors SMD", TC=±100ppm/°C
R20 R23 R25: library part R0402_0R_JUMPER, Case=0402, Manufacturer=GENERIC, Manufacturer1 ComponentHeight=0.4mm, Manufacturer1 Example="YAGEO PHYCOMP", Manufacturer1 Part Number=232270591001L, Author="CERN DEM JLC", Component Type=Standard, CreateDate=03.12.2007, HelpURL=\\cern.ch\dfs\Applications\Altium\Datasheets\R0402_Phycomp_RC0402.pdf, LatestRevisionDate=17.10.2012, Manufacturer Part Number=R0402_0R_JUMPER, Mounted=Yes, Part Description="1A (0.05R Max DC Resistance) Zero Ohm Jumper", Part Number=R0402_0R_JUMPER, Pin Count=2, SMD=Yes, Socket=No, Status="Not recommended", Table="Resistors SMD"
R30: library part R0402_1K_1%_0.0625W_100PPM, Case=0402, Manufacturer=GENERIC, Manufacturer1 ComponentHeight=0.4mm, Manufacturer1 Example="YAGEO PHYCOMP", Manufacturer1 Part Number=232270671002L, Power=0.0625W, Tolerance=±1%, Author="CERN DEM JLC", Component Type=Standard, CreateDate=03.12.2007, HelpURL=\\cern.ch\dfs\Applications\Altium\Datasheets\R0402_Phycomp_RC0402.pdf, LatestRevisionDate=17.10.2012, Manufacturer Part Number=R0402_1K_1%_0.0625W_100PPM, Mounted=Yes, Part Description="General Purpose Thick Film Chip Resistor", Part Number=R0402_1K_1%_0.0625W_100PPM, Pin Count=2, SMD=Yes, Socket=No, Status="Not recommended", Table="Resistors SMD", TC=±100ppm/°C
U1: library part CMP-0237-00099-1, "STM32 ARM-based 32-bit MCU Connectivity Line with 512 kB Flash, 128 kB Internal RAM, -40 to +85°C Temperature, 64-Pin LQFP, Tray", ComponentLink1Description="STM32F205/207 Datasheet", ComponentLink1URL=http://www.st.com/internet/com/TECHNICAL_RESOURCES/TECHNICAL_LITERATURE/DATASHEET/CD00237391.pdf, ComponentLink2Description="STM32 Family Web Page", ComponentLink2URL=www.st.com/stm32, ComponentLink3Description="st.com Home", ComponentLink3URL=http://www.st.com/internet/com/home/home.jsp, DatasheetVersion="rev6.0, Apr-2011", PackageDescription="64-Pin Low-Profile Quad Flat Pack, 10 x 10 mm Body, 0.5 mm Pitch (LQFP64)", PackageReference=LQFP64, PackageVersion="rev13, Apr-2011"
U3: library part CMP-0234-00056-3, "MEMS Digital Output Motion Sensor Ultra Low-Power High Performance 3-Axes \"nano\" Accelerometer, 1.71 to 3.6 V, -40 to 85 degC, 16-pin (LGA-16), Pb-Free, Tray", Current Consumption in Power-Down mode="0.5 uA", Manufacturer=STMicroelectronics, Operating Temperature="-40 to 85 degC", Wide Supply Voltage="1.71 to 3.6 V", Bandwidth="5 kHz", ComponentLink1Description="Manufacturer URL", ComponentLink1URL=http://www.st.com/, ComponentLink2Description=Datasheet, ComponentLink2URL=http://www.st.com/st-web-ui/static/active/en/resource/technical/document/datasheet/CD00274221.pdf, ComponentLink3Description="Package Specification", ComponentLink3URL=http://www.st.com/st-web-ui/static/active/en/resource/technical/document/datasheet/CD00274221.pdf, DatasheetVersion="Rev. 1", Interface="I2C, SPI", Mounting Technology="Surface Mount", Output Type=Digital, PackageDescription="16-Pin Land Grid Array, Body 3 x 3 mm, Pitch 0.5 mm", PackageReference=LGA-16, Packing=Tray, PartNumber=LIS3DH, RoHS=TRUE
U4 U6 U8 U9: library part C014S0053T0000000090L0000000090, ManufName="ST Microelectronics", PackageName=SOT-23-5L, ValueBOM="Микросхема LDS3985M28R ST Microelectronics", ClassName=Микросхема, Design Item ID=C014S0053T0000000090L0000000090, PartNumber=LDS3985M28R, SubClassName=аналоговая, Type=DA?, TypeName=LDS3985M28R, ValueSch=LDS3985M28R
U7: library part C014S0053T0000000112L0000000112, ManufName=Honywell, ValueBOM="Микросхема HMC5983 Honywell", ClassName=Микросхема, Design Item ID=C014S0053T0000000112L0000000112, PackageName=HMC5983, PartNumber=HMC5983, SubClassName="смешанного типа сигналов", Type=DA?, TypeName=HMC5983, ValueSch=HMC5983
U10: library part CMP-1753-00002-1, "3-Axis Gyroscope, 3-Axis Accelerometer / , 2.375 to 3.46 V, -40 to 105 degC, 24-Pin QFN, RoHS, Tape and Reel", Case/Package=0603, Case Code (Metric)=1608, Max Operating Temperature=155degC, Min Operating Temperature=-55degC, Package Quantity=5000, Power Rating="100 mW", Resistance="5.6 kohm", Tolerance=1%, Voltage Rating="75 V", Case Code (Imperial)=0603, ComponentLink1Description="Manufacturer URL", ComponentLink1URL=http://www.invensense.com/, ComponentLink2Description=Datasheet, ComponentLink2URL=https://datasheet.ciiva.com/1513/1788002-1513632.pdf, DatasheetVersion="Rev. 3.4, 08/2013", Height="0.45 mm", Length="1.6 mm", Mount="Surface Mount", PackageDescription="24-Pin Quad Flat No-lead Package, Body 4 x 4 mm, Pitch 0.5 mm", PackageReference=QFN-24, Packaging="Tape and Reel", Pins=2, Radiation Hardening=No, REACH SVHC=Yes, RoHSCompliant=True, Width="0.8 mm"
X1: library part C012S0075T0000000004L0000000004, "http://geyer-electronic.de/uploads/tx_userartikelfrequenz/GEYER-KX-7_01.pdf", ManufName=GEYER, PartNumber=KX-7, ValueBOM="Кварцевый генератор KX-7 24.0 MHz V_Power_key GEYER", ClassName="Пьезоэлектрические приборы", Design Item ID=C012S0075T0000000004L0000000004, SubClassName="Кварцевый генератор", Type=X?, ValuePE="24.0 MHz", ValueSch="24.0 MHz"
XP1 XP2 XP3 XP4 XP6: library part PLD-04, ComponentLink1URL=http://lib.chipdip.ru/227/DOC000227157.pdf, Device=PLD-04, Family=PLD, Part Number=PLD-04, Table=AUK
XP5: library part PLD-08, ComponentLink1URL=http://lib.chipdip.ru/227/DOC000227157.pdf, Device=PLD-08, Family=PLD, Part Number=PLD-08, Table=AUK
XP7: library part PLS-03, Manufacturer=AUK, ComponentLink1URL=http://lib.chipdip.ru/227/DOC000227157.pdf, Component Type=Standard, Device=PLS-03, Family=PLS, Manufacturer Part Number=PLS-03, PackageDescription=PLS-03, Part Number=PLS-03, Pin Count=3, SMD=Yes, Table=AUK
XP8: library part PLS-02, Manufacturer=AUK, ComponentLink1URL=http://lib.chipdip.ru/227/DOC000227157.pdf, Component Type=Standard, Device=PLS-02, Family=PLS, Manufacturer Part Number=PLS-02, PackageDescription=PLS-02, Part Number=PLS-02, Pin Count=2, SMD=No, Table=AUK
XP9: library part PLS-08, Manufacturer=AUK, ComponentLink1URL=http://lib.chipdip.ru/227/DOC000227157.pdf, Component Type=Standard, Device=PLS-08, Family=PLS, Manufacturer Part Number=PLS-08, PackageDescription=PLS-08, Part Number=PLS-08, Pin Count=8, SMD=Yes, Table=AUK
XP10: library part PLS-04, Manufacturer=AUK, ComponentLink1URL=http://lib.chipdip.ru/227/DOC000227157.pdf, Component Type=Standard, Device=PLS-04, Family=PLS, Manufacturer Part Number=PLS-04, PackageDescription=PLS-04, Part Number=PLS-04, Pin Count=4, SMD=No, Table=AUK
XS1: library part C011S0070T0000000044L0000000044, Current_pin_max=5, ManufName=NONE, ValueBOM="Розетка 105017-0001", VoltageMax=250, ClassName=Соединители, ConnectTypeKey=F, Design Item ID=C011S0070T0000000044L0000000044, Marking="\"XS?\"", NetQuantity=5, PartNumber=105017-0001, SubClassName=Розетка, Type=XS?, TypeName=105017-0001, ValueSch=105017-0001
U2: Device=L3G4200D, Part Number=L3G4200D, Table="Analog and Interface"
U5: Device=LPS331AP, Part Number=LPS331AP, Table="Analog and Interface"

## Free pads (board coordinates)
  round 4 hole 4 unplated: 0(-15,-15) 0(-15,15) 0(15,-15) 0(15,15)

## Via types
v1: diameter 0.6, hole 0.3, Top Layer to Bottom Layer, tented both sides, 137 vias
v2: diameter 1, hole 0.5, Top Layer to Bottom Layer, tented both sides, 14 vias
v3: diameter 0.5, hole 0.2, Top Layer to Bottom Layer, 9 vias

## Nets (pads, with @x,y where several pads share a name; then routed paths per layer and width w, separated by ;. In a path a pad name is that pad's centre, name@x,y a point inside that pad or via, vN(x,y) a via of type N, cw(c..) or ccw(c..) an arc to the next point about the centre after c; other vN are vias at no path point)
3V3EXT: C6.2 U4.5 XP1.1 XP2.1 XP6.1 | length 2.2
  Top Layer w0.6: C6.2 -9.5,-10.2 v2(-8.6,-10.2)
3V3R: C9.2 U6.5 XP7.1 | length 10.8
  Top Layer w0.6: C9.2@1,-8.85 U6.5 v2(1.9,-10.2)
  Signal Layer 3 w0.9: v2(1.9,-10.2) 3.65,-10.2 5.04,-11.59 XP7.1@5.04,-16.4
5V1: C19.2 R20.1 U9.5 XP3.1 | length 6.3
  Top Layer w0.2: R20.1@16.45,10.3 v1(17.025,10.3)
  Top Layer w0.6: C19.2@-2.5,-8.95 U9.5 v2(-1.6,-10.2)
  Signal Layer 4 w0.2: 13.95,9.1 15.15,10.3 v1(17.025,10.3)
ACC_INT: U1.53 U3.11 | length 10.1
  Top Layer w0.2: U1.53@4.15,-1.1 v1(4.85,-1.1) ; U3.11 v1(8.15,3.2)
  Bottom Layer w0.2: v1(4.85,-1.1) 3.85,-1.1 3.55,-0.8 3.55,0.55 6.2,3.2 v1(8.15,3.2)
ADC1_IN8: U1.26 | length 1.8
  Top Layer w0.2: U1.26 v1(-5.6,-0.1)
ADC1_IN9: C23.2 R28.1 R30.2 U1.27 | length 18.9
  Top Layer w0.2: R28.1 R30.2@-12.4,-11.5 ; v1(-13.025,-12.5) C23.2@-12.45,-12.5 ; C23.2@-12.4,-12.5 R30.2@-12.4,-11.7 ; U1.27 v1(-6.2,-0.6)
  Signal Layer 3 w0.2: v1(-13.025,-12.5) -13.025,-10.075 -9.25,-6.3 -9.25,-2.5 -7.35,-0.6 v1(-6.2,-0.6)
CAN1_RX: R33.1 U1.61 | length 1.6
  Top Layer w0.2: U1.61 4.55,2.9 R33.1
CAN1_TX: R32.1 U1.45 | length 1.5
  Top Layer w0.2: U1.45 0.35,-6 R32.1
EXT_EN: U1.9 U4.3 | length 27.2
  Top Layer w0.2: U4.3 v1(-6.9,-12.85) ; v1(-2.15,4.95) U1.9
  Signal Layer 3 w0.2: v1(-6.9,-12.85) -6.9,-6.65 -4.5,-4.25 -4.5,-1.5 -4.15,-1.15 -2.15,-1.15 1.5,2.5 1.5,3.6 0.15,4.95 v1(-2.15,4.95)
GND: C1.2 C2.2 C4.1 C5.1 C6.1 C7.2 C8.1 C9.1 C10.2 C11.1 C12.1 C13.1 C14.1 C15.2 C16.2 C18.1 C19.1 C20.2 C21.2 C22.2 C23.1 C24.1 C25.1 C26.2 C27.2 C28.2 C29.2 C30.2 C31.2 C32.2 C33.2 C34.2 C35.2 C36.2 C37.2 C38.2 C39.2 C40.2 C41.2 C42.1 R3.1 R30.1 U1.12 U1.18 U1.60 U1.63 U2.8 U2.9 U2.10 U2.11 U2.12 U2.13 U3.5 U3.7 U3.10 U3.12 U4.2 U5.5 U5.7 U5.10 U5.12 U5.13 U5.16 U6.2 U7.9 U7.11 U8.2 U9.2 U10.1 U10.9 U10.11 U10.18 U10.25 X1.2 X1.4 XP1.2 XP2.2 XP3.2 XP4.2 XP5.8 XP6.2 XP7.2 XP8.2 XS1.5 XS1.SHLD | length 1.4
  Top Layer w0.2: U1.60 5.05,2.4
  other v1: -11.5,-13.35 9.8,-11.975 6.375,-11.25 11.75,-7.875 -14.25,-7.7 11.475,-6.9 5.775,-6.85 3.5,-5.65 10.925,-5.05 -8.075,-4.75 -12.15,-4.1 10.8,-4 -14.425,-3.95 11.3,-3 -10.35,-2.6 8.196,-1.255 -8.65,-0.85 7.05,-0.4 9.85,-0.4 -9.45,-0.15 7.65,1.6 12.2,3.05 9.45,3.85 4.85,4.2 10.35,4.8 -9,4.925 5.25,5.3 -10.6,7.15 8.775,7.15 10.55,7.375 3.6,7.4 -3.55,7.65 11.7,8.05 -9.35,8.3 -7.45,8.35 2.95,8.35 9,8.675 3.8,9.15 -8.8,9.35 -7.4,9.85 -4.7,9.9 -2.75,9.95 -1.8,9.95 5.45,10.65 -10.8,10.75 -9.95,10.85 -0.5,10.95 -7.95,11.65
  other v2: -7.05,-14.25 -0.05,-14.25 -3.55,-14.2 3.45,-14.2 -8.4,-7.5 -1.4,-7.5 -4.9,-7.45 2.1,-7.45
  other v3: 7.65,-9.125 8.65,-9.125 9.65,-9.125 7.65,-8.125 8.65,-8.125 9.65,-8.125 7.65,-7.125 8.65,-7.125 9.65,-7.125
I2C1_SCL: R4.1 R18.2 U1.58 U2.2 U3.4 U5.4 U7.1 U10.23 | length 57.5
  Top Layer w0.2: v1(-11.35,8.35) U5.4 ; R4.1@2.1,11.75 R4.1 v1(2.75,11.75) ; v1(2.35,1.4) U1.58 ; R18.2@4.8,8.7 4.825,8.675 U2.2 v1(6.525,8.675) ; U7.1@7.7,-3.1 v1(7.7,-3.8) 7.7,-4.3 7.9,-4.5 U10.23@7.9,-5.8 ; U3.4 v1(11.15,3.7)
  Signal Layer 3 w0.2: v1(-11.35,8.35) -10.65,8.35 -10,7.7 -6.95,7.7 -5.55,9.1 0.1,9.1 v1(2.75,11.75) 3.95,10.55 3.95,9.95 5.225,8.675 v1(6.525,8.675)
  Bottom Layer w0.2: v1(7.7,-3.8) 6.65,-3.8 5.85,-3 5.85,-2.6 5.25,-2 3.6,-2 2.8,-1.2 2.8,0.45 2.35,0.9 v1(2.35,1.4) 1.65,2.1 1.65,3.65 1.9,3.9 2.95,3.9 4.85,5.8 6.05,5.8 6.525,6.275 v1(6.525,8.675) 8.075,8.675 8.6,8.15 9.3,8.15 9.85,7.6 9.85,6.95 11.15,5.65 v1(11.15,3.7)
I2C1_SDA: R5.2 R16.2 U1.62 U2.3 U3.6 U5.6 U7.16 U10.24 | length 51.9
  Top Layer w0.2: v1(-9.85,6.95) U5.6@-9.85,7.65 ; v1(2.15,3.4) U1.62 ; R5.2 v1(5.075,11.75) ; R16.2 4.875,8.025 U2.3 v1(7.15,8.025) ; v1(6.45,-2.6) U7.16@7.15,-2.6 ; U7.16 7.155,-4.355 7.4,-4.6 U10.24 ; U3.6@9.3,4.95 v1(9.3,5.55)
  Signal Layer 3 w0.2: v1(-9.85,6.95) -8.2,5.3 -8.2,4.75 -7.1,3.65 -4.25,3.65 -2.4,5.5 0.1,5.5 2.15,3.45 v1(2.15,3.4) ; v1(5.075,11.75) 5.9,11.75 7.15,10.5 v1(7.15,8.025)
  Bottom Layer w0.2: v1(2.15,3.4) 2.15,2.4 2.95,1.6 2.95,0.9 3.15,0.7 3.15,-1.1 3.75,-1.7 5.55,-1.7 v1(6.45,-2.6) ; v1@2.2,3.4 3,3.4 4.35,4.75 6.1,4.75 7.15,5.8 v1(7.15,8.025) 8.075,8.025 8.35,7.75 9.15,7.75 9.3,7.6 v1(9.3,5.55)
I2C3_SCL: R6.1 R24.2 U1.41 | length 38.3
  Top Layer w0.2: U1.41@-1.65,-5 U1.41 v1(-1.65,-3.65) ; R6.1@8.9,11.75 10.2,11.75 10.85,11.1 12.425,11.1 v1(13.225,10.3) R24.2
  Signal Layer 3 w0.2: v1(-1.65,-3.65) -2.35,-3.65 -2.7,-3.3 -2.7,-2.8 2.7,2.6 9.25,2.6 10.95,0.9 12,0.9 12.65,0.25 13.35,0.25 13.85,0.75 13.85,9.675 v1(13.225,10.3)
I2C3_SDA: R7.2 R21.2 U1.40 | length 34.6
  Top Layer w0.2: U1.40 v1(-2.15,-3.05) ; R7.2 12.775,11.75 v1(13.175,11.35) R21.2@13.75,11.35
  Signal Layer 3 w0.2: v1(-2.15,-3.05) 1.75,0.85 2.6,0.85 4,2.25 9,2.25 10.7,0.55 11.75,0.55 12.4,-0.1 13.55,-0.1 14.25,0.6 14.25,10.275 v1(13.175,11.35)
NetC3_1: C3.1 R3.2 | length 0.9
  Top Layer w0.2: C3.1@11.6,10.35 11.6,9.55 R3.2@11.7,9.45
NetC3_2: C3.2 C4.2 U2.14 | length 4.3
  Top Layer w0.2: U2.14 8.125,10.725 8.3,10.9 10.3,10.9 10.7,10.5 C3.2 10.7,9.5 C4.2@10.75,9.45
NetC7_1: C7.1 U4.4 | length 1
  Top Layer w0.4: U4.4 C7.1@-7.6,-9.25
NetC10_1: C10.1 U6.4 | length 1.2
  Top Layer w0.4: C10.1@2.85,-9.05 2.9,-9.1 U6.4
NetC11_2: C11.2 U1.31 | length 1.3
  Top Layer w0.2: C11.2 U1.31
NetC12_2: C12.2 U1.47 | length 1.4
  Top Layer w0.2: C12.2@1.35,-6.3 U1.47
NetC15_1: C15.1 U8.4 | length 1.2
  Top Layer w0.4: C15.1@-4.15,-9.05 -4.1,-9.1 U8.4
NetC16_1: C16.1 U7.10 | length 0.9
  Top Layer w0.2: C16.1@8.6,0.35 8.7,0.25 U7.10
NetC17_1: C17.1 U7.12 | length 5.2
  Top Layer w0.2: U7.12 v1(7.688,0.145) ; C17.1 v1(11.3,-0.25)
  Bottom Layer w0.2: v1(7.688,0.145) 10.905,0.145 v1(11.3,-0.25)
NetC17_2: C17.2 U7.8 | length 0.8
  Top Layer w0.2: U7.8 C17.2@10.562,-1.088
NetC20_1: C20.1 U9.4 | length 1.2
  Top Layer w0.4: C20.1@-0.65,-9.05 -0.6,-9.1 U9.4
NetC21_1: C21.1 U10.20 | length 1.1
  Top Layer w0.2: U10.20 C21.1
NetC22_1: C22.1 U10.10 | length 1.2
  Top Layer w0.2: C22.1 U10.10
NetR1_2: R1.2 XP1.3 | length 2
  Top Layer w0.2: R1.2@-4.27,11.75 XP1.3
NetR2_1: R2.1 XP1.4 | length 1.7
  Top Layer w0.2: R2.1@-1.73,12.02 XP1.4
NetR4_2: R4.2 XP2.3 | length 2.1
  Top Layer w0.2: R4.2@1.2,11.75 1.85,12.4 XP2.3@1.85,13.55
NetR5_1: R5.1 XP2.4 | length 2.1
  Top Layer w0.2: R5.1 3.6,12.76 XP2.4@4.39,13.55
NetR6_2: R6.2 XP3.3 | length 2
  Top Layer w0.2: XP3.3 7.95,13.71 R6.2
NetR7_1: R7.1 XP3.4 | length 2.3
  Top Layer w0.2: XP3.4 10.47,12.53 R7.1
NetR9_2: R9.2 XP6.3 | length 2.4
  Top Layer w0.2: R9.2 -11.35,12.8 XP6.3
NetR10_1: R10.1 XP6.4 | length 2.3
  Top Layer w0.2: XP6.4 -7.88,12.53 R10.1
NetR11_2: R11.2 XP9.1 | length 1.8
  Top Layer w0.3: R11.2 16.24,8.4 XP9.1@16.25,8.39
NetR12_2: R12.2 XP9.2 | length 1.7
  Top Layer w0.3: R12.2 XP9.2@16.25,5.85
NetR13_2: R13.2 XP9.3 | length 1.8
  Top Layer w0.3: R13.2 16.24,3.3 XP9.3@16.25,3.31
NetR14_2: R14.2 XP9.4 | length 1.8
  Top Layer w0.3: R14.2 16.22,0.8 XP9.4@16.25,0.77
NetR15_2: R15.2 XP9.5 | length 1.8
  Top Layer w0.3: R15.2 16.23,-1.75 XP9.5@16.25,-1.77
NetR17_2: R17.2 XP9.6 | length 1.8
  Top Layer w0.3: R17.2 16.24,-4.3 XP9.6@16.25,-4.31
NetR19_2: R19.2 XP9.7 | length 1.7
  Top Layer w0.3: R19.2 XP9.7@16.25,-6.85
NetR20_2: R20.2 R21.1 R23.2 R24.1 | length 2.6
  Top Layer w0.2: R20.2 R24.1 R21.1 R23.2
NetR22_2: R22.2 XP9.8 | length 1.8
  Top Layer w0.3: R22.2 16.24,-9.4 XP9.8@16.25,-9.39
NetR26_2: R26.2 XP10.3 | length 13.3
  Top Layer w0.2: v1(-3.725,-6.3) R26.2@-3.15,-6.3
  Bottom Layer w0.2: XP10.3@-8.32,-16.4 -8.32,-13.17 -6.6,-11.45 -6.6,-7.95 -4.95,-6.3 v1(-3.725,-6.3)
NetR27_2: R27.2 XP10.4 | length 1.8
  Top Layer w0.2: XP10.4@-10.86,-16.4 -10.75,-16.29 R27.2
NetR31_2: R31.2 XP7.3 | length 23.8
  Top Layer w0.2: R31.2@5.95,1.25 v1(6.55,1.25)
  Signal Layer 3 w0.2: XP7.3 1.15,-15.31 1.15,-6.1 0.6,-5.55 0.6,-0.85 1.95,0.5 2.85,0.5 3.6,1.25 v1(6.55,1.25)
NetR32_2: R32.2 XP10.1 | length 11.5
  Top Layer w0.2: v1(-0.3,-6.95) R32.2
  Bottom Layer w0.2: XP10.1 -1.7,-14.96 -1.7,-12.75 -0.3,-11.35 v1(-0.3,-6.95)
NetR33_2: R33.2 XP10.2 | length 27.5
  Top Layer w0.2: R33.2@5.95,3.45 v1(5.95,4.1)
  Signal Layer 3 w0.2: XP10.2 -5.78,-13.73 -3.05,-11 -3.05,-2.6 2.5,2.95 4.8,2.95 v1(5.95,4.1)
NRST: C24.2 R29.1 U1.7 | length 4.2
  Top Layer w0.2: R29.1 C24.2 -2.1,7.7 -1.5,7.7 -1.15,7.35 U1.7
RX_EN: U1.8 U6.3 | length 22.6
  Top Layer w0.2: v1(-1.65,4.35) U1.8 ; U6.3 v1(3.6,-12.8)
  Signal Layer 3 w0.2: v1(1.2,-1.45) 1.2,-2 0.95,-2.25 0.95,-5.1 2.6,-6.75 v1(3.6,-6.75)
  Bottom Layer w0.2: v1(-1.65,4.35) -1.65,3.2 1.2,0.35 v1(1.2,-1.45) ; v1(3.6,-12.8) v1(3.6,-6.75)
SPI_CE: U1.25 XP5.2 | length 17.1
  Top Layer w0.2: XP5.2 -12.45,9.37 -12.45,7.4 -11.15,6.1 -7.25,6.1 -5.95,4.8 -5.95,0.85 -6.4,0.4 U1.25
SPI_CS: U1.20 XP5.1 | length 13.9
  Top Layer w0.2: XP5.1 -15.1,9.48 -15.1,7.55 -14.45,6.9 -13.25,6.9 -12.5,6.15 -12.5,5.2 -10.2,2.9 U1.20
SPI_IRQ: U1.24 XP5.4 | length 13.6
  Top Layer w0.2: XP5.4 -11.32,5.7 -7.4,5.7 -6.35,4.65 -6.35,1.1 -6.55,0.9 U1.24
SPI_MISIO: U1.22 XP5.5 | length 12.1
  Top Layer w0.2: XP5.5 -15.1,4.4 -15.1,2.6 -14.35,1.85 -13.15,1.85 -12.45,2.55 -10.95,2.55 -10.3,1.9 U1.22
SPI_MOSI: U1.23 XP5.7 | length 10.4
  Top Layer w0.2: XP5.7 -14.54,1.3 -13.15,1.3 -12.25,2.2 -11.2,2.2 -10.4,1.4 U1.23
SPI_SCK: U1.21 XP5.3 | length 12.4
  Top Layer w0.2: XP5.3 -15.1,6.94 -15.1,5.15 -14.35,4.4 -12.2,4.4 -10.2,2.4 U1.21
SWCK: U1.49 XP4.3 | length 15.5
  Top Layer w0.2: U1.49 3.625,-3.425 4.7,-4.5 4.7,-10.9 6.25,-12.45 9.54,-12.45 XP4.3@10.82,-13.73
SWIO: U1.46 XP4.4 | length 16.4
  Top Layer w0.2: U1.46 0.85,-4 1.15,-3.7 2.3,-3.7 2.65,-4.05 3.75,-4.05 4.3,-4.6 4.3,-11.1 6.1,-12.9 7.45,-12.9 XP4.4@8.28,-13.73
TIM1_CH3: R26.1 U1.43 | length 2.7
  Top Layer w0.2: R26.1 -1.9,-6 -0.9,-6 -0.65,-5.75 U1.43
TIM1_CH4: R27.1 U1.44 | length 19.2
  Top Layer w0.2: R27.1@-10.75,-13.7 v1(-10.75,-13.125) ; U1.44 v1(-0.15,-3.05)
  Bottom Layer w0.2: v1(-10.75,-13.125) -8.825,-13.125 -6.9,-11.2 -6.9,-7.75 -4.95,-5.8 -2.9,-5.8 v1(-0.15,-3.05)
TIM2_CH1: R15.1 U1.50 | length 12.1
  Top Layer w0.2: U1.50@4.15,-2.6 v1(4.85,-2.6) ; v1(12.9,-1.75) R15.1
  Bottom Layer w0.2: v1(4.85,-2.6) 6.8,-4.55 11.2,-4.55 11.95,-3.8 11.95,-2.7 v1(12.9,-1.75)
TIM2_CH2: R17.1 U1.55 | length 14.3
  Top Layer w0.2: U1.55@4.15,-0.1 v1(4.85,-0.1) ; v1(12.9,-4.3) R17.1
  Bottom Layer w0.2: v1(4.85,-0.1) 5.85,-1.1 6.65,-1.1 7.4,-1.85 10.6,-1.85 11.3,-1.15 13.1,-1.15 13.6,-1.65 13.6,-3.6 v1(12.9,-4.3)
TIM2_CH3: R19.1 U1.29 | length 23.7
  Top Layer w0.2: U1.29 v1(-6.2,-1.6) ; v1(12.9,-6.85) R19.1
  Bottom Layer w0.2: v1(-6.2,-1.6) -5,-1.6 -4.25,-2.35 -2.8,-2.35 -2.2,-1.75 0.1,-1.75 1.4,-3.05 3.45,-3.05 6.2,-5.8 11.85,-5.8 v1(12.9,-6.85)
TIM2_CH4: R22.1 U1.30 | length 25.7
  Top Layer w0.2: U1.30 v1(-5.6,-2.1) ; v1(12.85,-9.4) R22.1
  Bottom Layer w0.2: v1(-5.6,-2.1) -5.05,-2.1 -4.4,-2.75 -2.7,-2.75 -2.05,-2.1 -0.05,-2.1 1.25,-3.4 3.25,-3.4 6,-6.15 11.5,-6.15 12.35,-7 12.35,-8.9 v1(12.85,-9.4)
TIM5_CH1: R11.1 U1.14 | length 23.7
  Top Layer w0.2: v1(-5.4,7.6) -4.95,7.6 -4.65,7.3 U1.14 ; v1(12.9,8.4) R11.1
  Signal Layer 3 w0.2: v1(-5.4,7.6) -4.85,7.05 -0.05,7.05 1.85,8.95 3.15,8.95 4.8,7.3 6.3,7.3 7,6.6 11.1,6.6 v1(12.9,8.4)
TIM5_CH2: R12.1 U1.15 | length 20.7
  Top Layer w0.2: v1(-5.15,4.95) U1.15@-5.15,5.55 ; v1(12.95,5.85) R12.1 R12.1@13.65,5.85
  Signal Layer 3 w0.2: v1(-5.15,4.95) -3.45,6.65 3.9,6.65 4.25,7 6.1,7 6.85,6.25 9.85,6.25 10.25,5.85 v1(12.95,5.85)
TIM5_CH3: R13.1 U1.16 | length 24.3
  Top Layer w0.2: v1(-6.25,6.2) U1.16@-5.65,6.2 ; v1(12.95,3.3) R13.1 R13.1@13.65,3.3
  Signal Layer 3 w0.2: v1(-6.25,6.2) -5.7,5.65 -5.7,4.6 -5.5,4.4 -4.9,4.4 -3,6.3 2.35,6.3 3.3,5.35 3.9,5.35 4.4,5.85 7.15,5.85 8.05,4.95 9.3,4.95 10,4.25 12,4.25 v1(12.95,3.3)
TIM5_CH4: R14.1 U1.17 | length 25.3
  Top Layer w0.2: U1.17@-7.45,4.4 v1(-7.45,4.975) ; v1(12.9,0.8) R14.1
  Signal Layer 3 w0.2: v1(-7.45,4.975) -6.525,4.05 -4.5,4.05 -2.6,5.95 0.15,5.95 1.8,4.3 3.95,4.3 4.4,4.75 6.1,4.75 7.1,3.75 8.55,3.75 10.2,2.1 11.6,2.1 v1(12.9,0.8)
UART1_RX: R31.1 U1.59 | length 1.7
  Top Layer w0.2: U1.59 4.45,1.9 R31.1 R31.1@5.05,1.25
UART1_TX: U1.42 | length 1.8
  Top Layer w0.2: U1.42 v1(-1.15,-3.05)
UART3_RX: R2.2 U1.52 | length 15.6
  Top Layer w0.2: R2.2@-0.85,11.75 v1(-0.275,11.75) ; v1(2.425,-1.6) U1.52@3,-1.6
  Bottom Layer w0.2: v1(-0.275,11.75) 1.3,10.175 1.3,1.4 2.425,0.275 v1(2.425,-1.6)
UART3_TX: R1.1 U1.51 | length 18.5
  Top Layer w0.2: R1.1@-3.35,11.75 v1(-2.775,11.75) ; v1(1.8,-2.1) U1.51
  Bottom Layer w0.2: v1(-2.775,11.75) -1.925,10.9 -1.35,10.9 0.9,8.65 0.9,1.2 1.8,0.3 v1(1.8,-2.1)
UART6_RX: R10.2 U1.38 | length 18.7
  Top Layer w0.2: R10.2@-6.25,11.75 R10.2 v1(-5.55,11.75) ; U1.38 v1(-3.15,-1.75)
  Bottom Layer w0.2: v1(-5.55,11.75) -6.05,11.25 -6.05,7.3 -3.55,4.8 -3.55,-1.35 v1(-3.15,-1.75)
UART6_TX: R9.1 U1.37 | length 20.7
  Top Layer w0.2: R9.1 v1(-9.75,11.75) ; v1(-3.95,-1.75) -3.65,-2.05 U1.37
  Bottom Layer w0.2: v1(-9.75,11.75) -8.65,10.65 -7.2,10.65 -6.45,9.9 -6.45,7.15 -3.95,4.65 v1(-3.95,-1.75)
USB_DM: U1.35 XS1.2 | length 12
  Top Layer w0.2: XS1.2 -11.8,-2 -10.9,-2.9 -10.9,-3.95 -8.75,-6.1 -4.95,-6.1 -4.65,-5.8 U1.35
USB_DP: U1.36 XS1.3 | length 12.6
  Top Layer w0.2: XS1.3 -11.75,-2.65 -11.3,-3.1 -11.3,-4.15 -8.95,-6.5 -4.75,-6.5 -4.15,-5.9 U1.36
USB_ID: U1.33 XS1.4 | length 9.1
  Top Layer w0.2: XS1.4@-13.4,-3.3 XS1.4 v1(-12.175,-3.3) ; U1.33 v1(-5.65,-3.65)
  Bottom Layer w0.2: v1(-12.175,-3.3) -7.85,-3.3 -7.5,-3.65 v1(-5.65,-3.65)
USB_VBUS: R25.1 U1.34 | length 8.9
  Top Layer w0.2: R25.1 v1(-10.4,0) ; U1.34 v1(-5.15,-3.05)
  Bottom Layer w0.2: v1(-10.4,0) -7.35,-3.05 v1(-5.15,-3.05)
VBUS: C42.2 D1.1 R25.2 XS1.1 | length 4.5
  Top Layer w0.4: XS1.1@-13.25,-1.35 -12.05,-1.35 v2(-11.9,-1.2) R25.2
  Top Layer w0.5: D1.1 v2(-12.75,-7.55)
  Top Layer w0.7: v2(-11.9,-1.2) C42.2@-10.9,-1.2
VCC: C25.2 D1.2 R28.2 XP8.1 | length 2.7
  Top Layer w0.4: R28.2@-14.2,-11.65 R28.2 C25.2@-14.2,-10.5
  Top Layer w0.6: C25.2@-14.2,-10.5 -14.05,-10.35 D1.2
VCOM: C5.2 C8.2 C13.2 C18.2 D1.3 U4.1 U6.1 U8.1 U8.3 U9.1 U9.3 | length 11.7
  Top Layer w0.6: C5.2@-9.5,-14.25 -9.5,-11.75 ; C13.2@-6,-14.2 U8.1 -6,-11.55 ; U8.3 -4.1,-11.5 ; C18.2@-2.5,-14.2 -2.5,-11.55 ; U9.3 -0.6,-11.6 ; C8.2@1,-14.2 U6.1
VDD: C14.2 C26.1 C27.1 C28.1 C29.1 C30.1 C31.1 C32.1 C33.1 C34.1 C35.1 C36.1 C37.1 C38.1 C39.1 C40.1 C41.1 R16.1 R18.1 R23.1 R29.2 U1.1 U1.13 U1.19 U1.32 U1.48 U1.64 U2.1 U2.4 U2.5 U2.15 U2.16 U3.1 U3.8 U3.14 U5.1 U5.8 U5.14 U5.15 U7.2 U7.4 U7.6 U7.13 U8.5 U10.8 U10.13 XP4.1 XP5.6 | length 44.4